# EAGLE board BlackBoard-Artemis (EAGLE 9.3.0), part 1 of 2
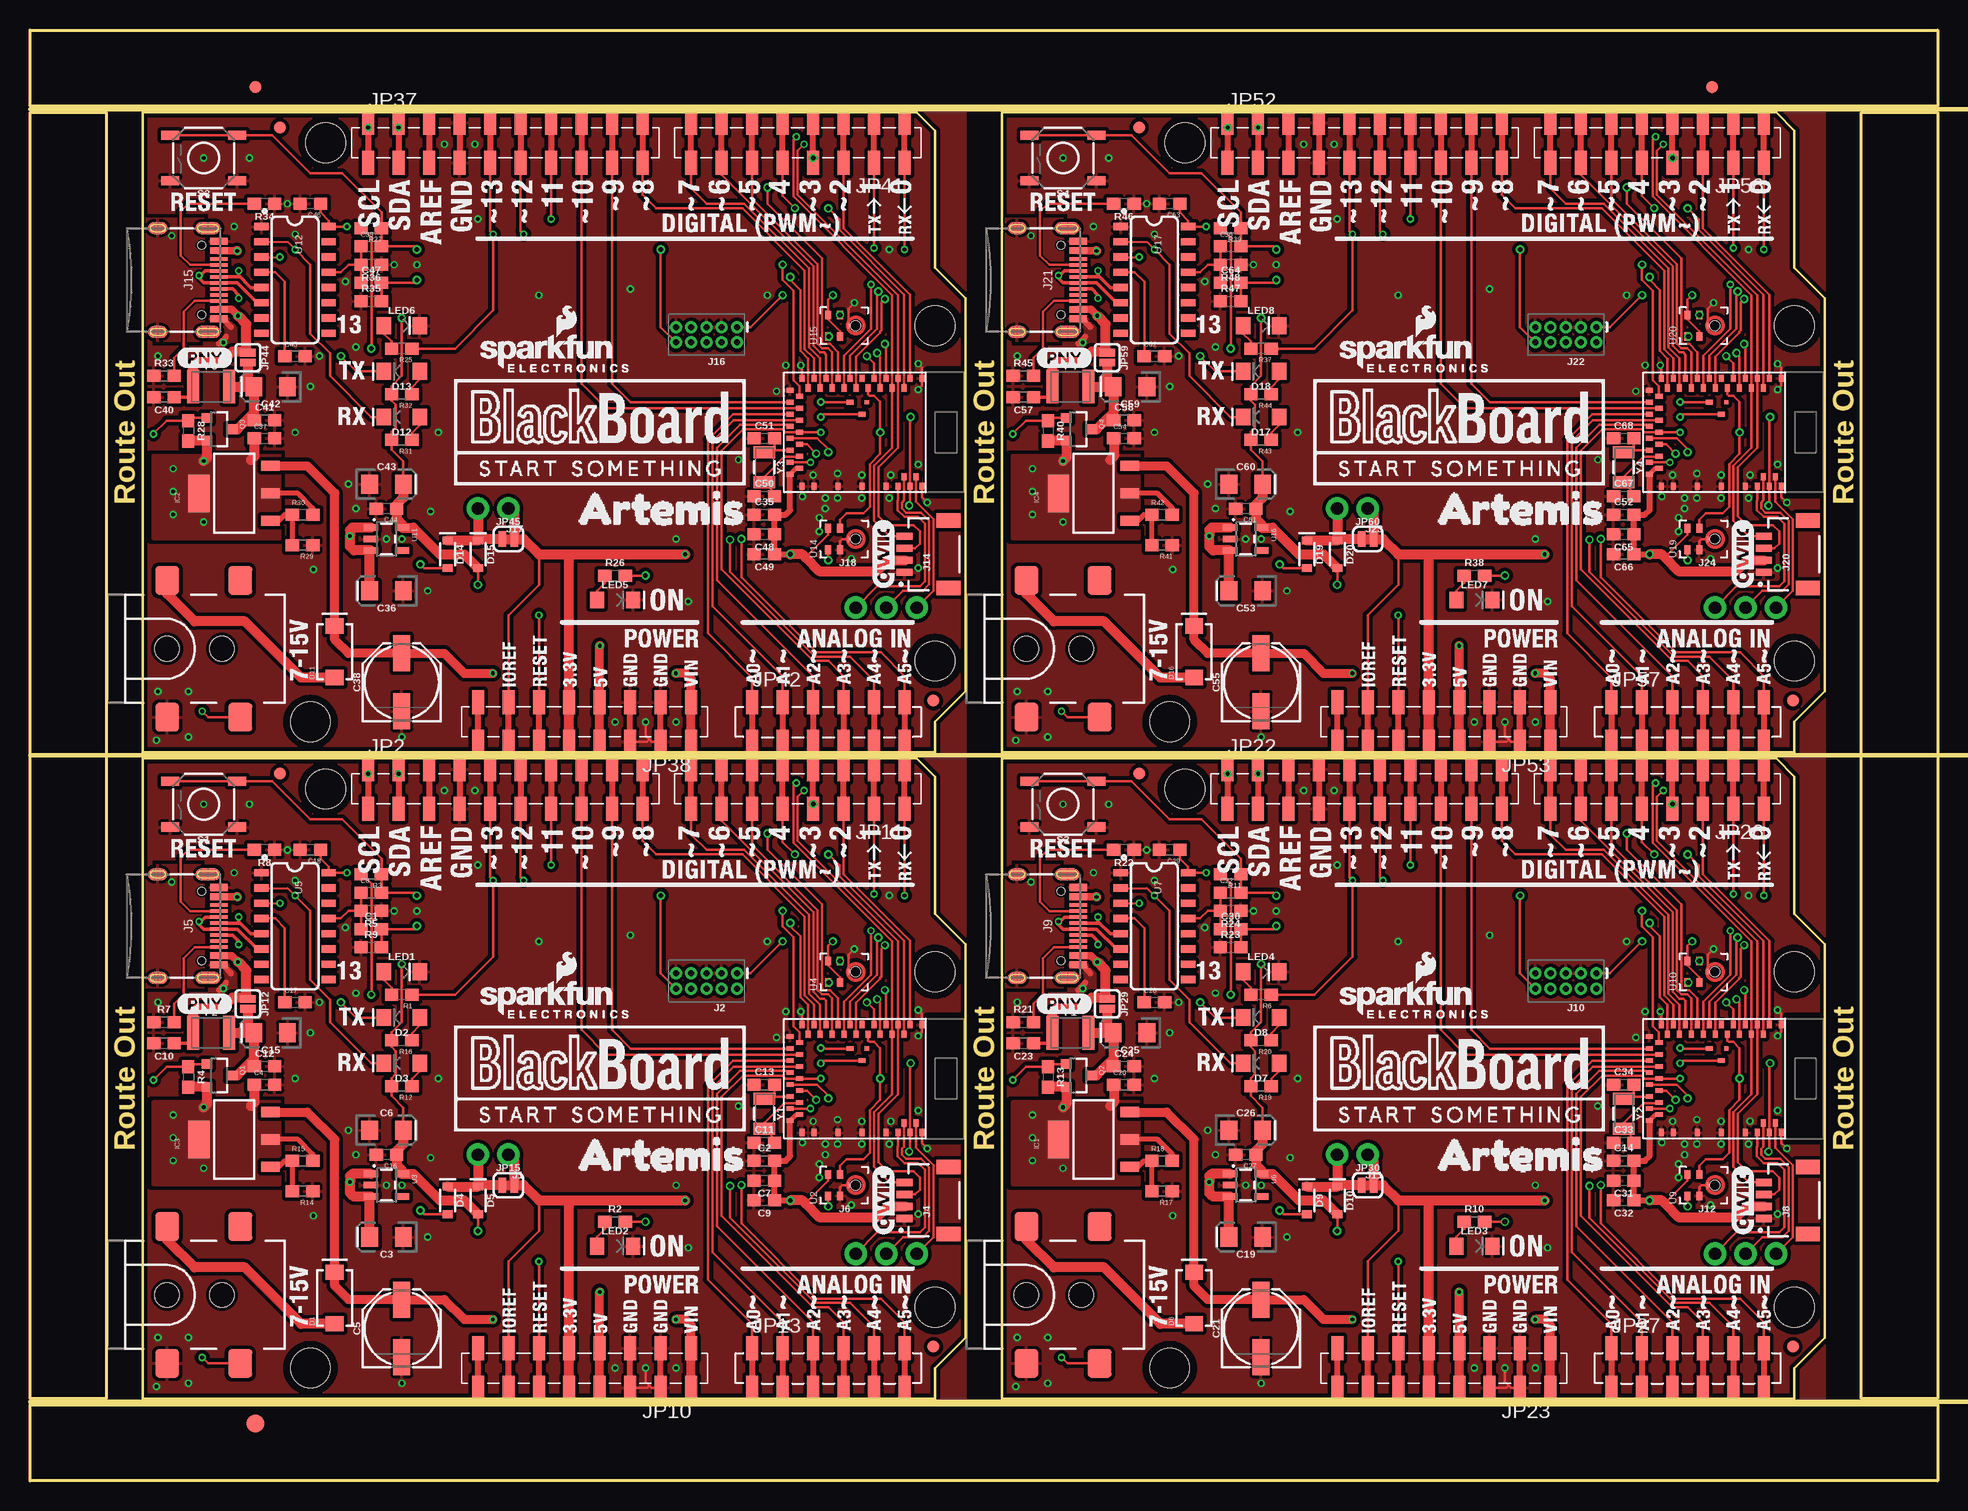
[diagram p0: board, top side]
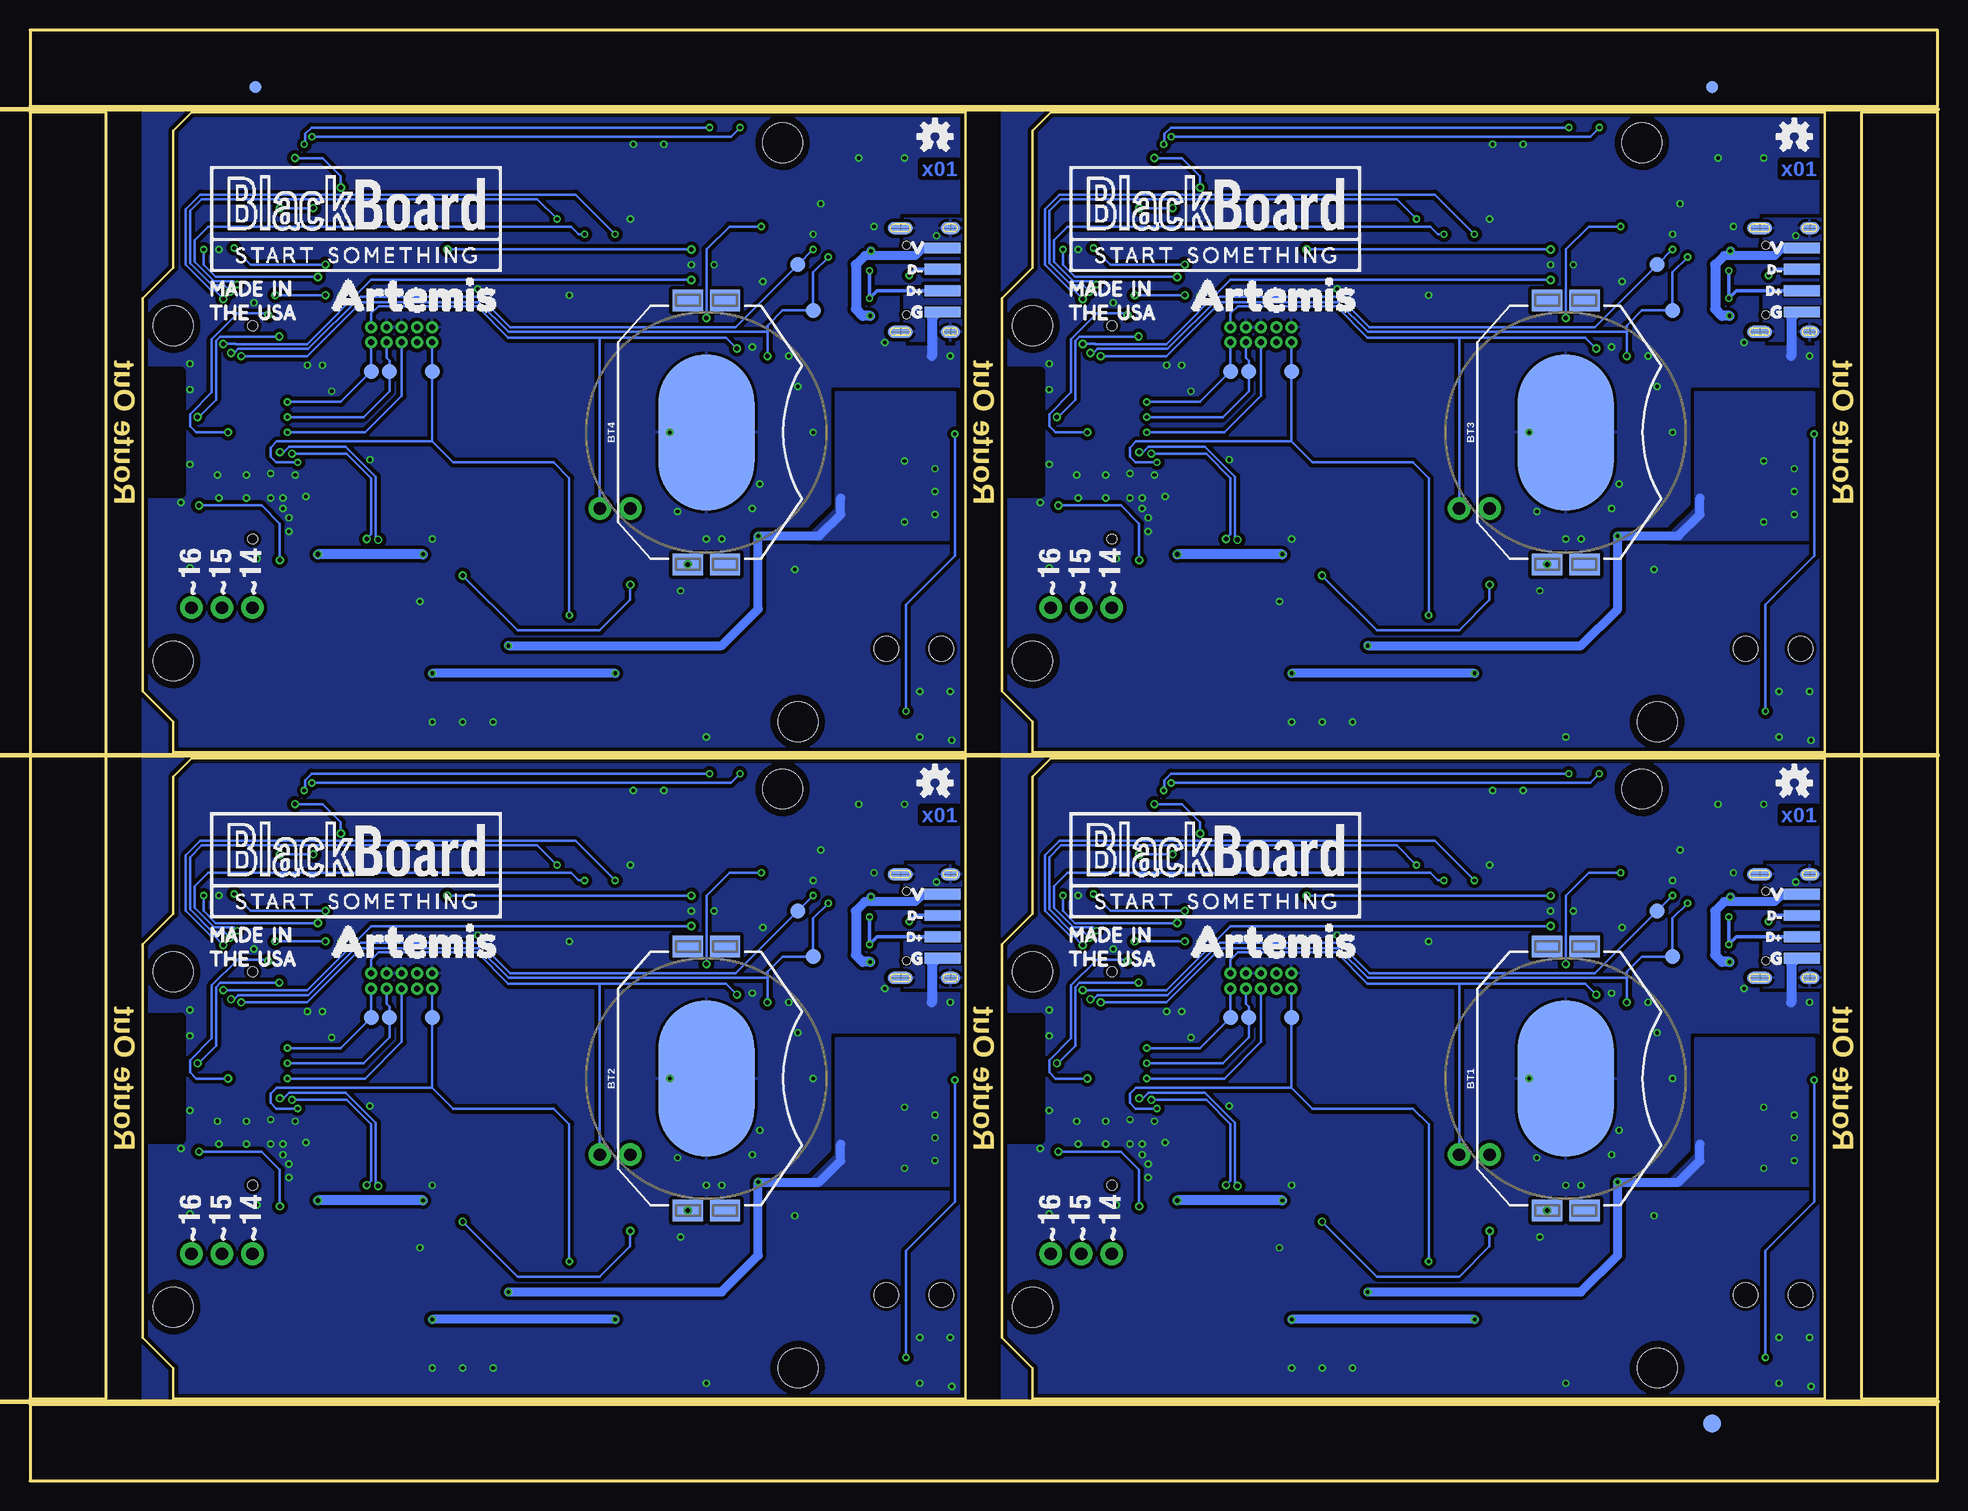
[diagram p1: board, bottom side, seen from below]

Size 159 x 120.9 mm. Coordinates in mm from the lower left corner, seen from the top.
Outline: 9.4,60.2 73.91,60.2 75.44,58.67 75.44,47.24 77.98,44.7 77.98,11.94 75.44,9.4 75.44,6.86 9.4,6.86 9.4,60.2
Outline: 81.03,60.2 145.54,60.2 147.07,58.67 147.07,47.24 149.61,44.7 149.61,11.94 147.07,9.4 147.07,6.86 81.03,6.86 81.03,60.2
Outline: 9.4,114.05 73.91,114.05 75.44,112.52 75.44,101.09 77.98,98.55 77.98,65.79 75.44,63.25 75.44,60.71 9.4,60.71 9.4,114.05
Outline: 81.03,114.05 145.54,114.05 147.07,112.52 147.07,101.09 149.61,98.55 149.61,65.79 147.07,63.25 147.07,60.71 81.03,60.71 81.03,114.05
Outline: 0,6.35 159,6.35 159,0 0,0 0,6.35
Outline: 152.65,114.05 159,114.05 159,6.86 152.65,6.86 152.65,114.05
Outline: 0,120.9 159,120.9 159,114.55 0,114.55 0,120.9
Outline: 0,114.05 6.35,114.05 6.35,6.86 0,6.86 0,114.05
Copper layers (1*16): Top 0.035mm / dielectric 1.5mm / Bottom 0.035mm
Design rules "SparkFun-2-layer-PCBWay-LIMIT": minimum track width 6mil, minimum drill 0.3mm, track to track 6mil, track to pad 6mil, pad to pad 6mil, via to via 6mil, smd to smd 6mil, copper to edge 6mil, drill to drill 6mil, minimum pad ring 6mil, minimum via ring 6mil, stop-mask expansion 4mil, vias tented up to drill 25mil, thermal gap 10mil
Net classes: 0 default: width 0 mm, drill 0 mm; 1 power: width 0.762 mm
tRestrict: area 74.8,28.4 to 78,38.6; area 146.4,28.4 to 149.6,38.6; area 74.8,82.3 to 78,92.5; area 146.4,82.3 to 149.6,92.5
bRestrict: area 74.8,28.4 to 78,38.6; area 146.4,28.4 to 149.6,38.6; area 74.8,82.3 to 78,92.5; area 146.4,82.3 to 149.6,92.5
vRestrict: area 10,29.2 to 11.4,37.5; area 15.1,30 to 16.8,37.5; area 57.3,17.7 to 57.9,18.2; area 59.8,17.5 to 60.3,18.4; area 20.7,36.2 to 22.1,38.5; area 9.7,19.8 to 18.8,31.9; area 81.7,29.2 to 83.1,37.5; area 86.7,30 to 88.4,37.5; area 128.9,17.7 to 129.5,18.2; area 131.4,17.5 to 132,18.4; area 92.3,36.2 to 93.7,38.5; area 81.3,19.8 to 90.4,31.9; area 10,83.1 to 11.4,91.3; area 15.1,83.8 to 16.8,91.3; area 57.3,71.5 to 57.9,72; area 59.8,71.4 to 60.3,72.3; area 20.7,90 to 22.1,92.3; area 9.7,73.7 to 18.8,85.7; area 81.7,83.1 to 83.1,91.3; area 86.7,83.8 to 88.4,91.3; area 128.9,71.5 to 129.5,72; area 131.4,71.4 to 132,72.3; area 92.3,90 to 93.7,92.3; area 81.3,73.7 to 90.4,85.7
Milling: 3 lines

## Footprints (pad centres in the part's own frame; a part is rotated, then mirrored left to right if it is on the bottom)
BATTCON_20MM_4LEGS_OVERPASTE = smd 1.778 x 2.54: 1 -11,1.55; 3 11,1.55; P$1 -11,-1.55; P$2 11,-1.55 | smd 13 x 8: 2 0,0
0603 = smd 1.1 x 1: 1 -0.85,0; 2 0.85,0
EIA3216 = smd 1.4 x 1.6: + 1.4,0; - -1.4,0
PANASONIC_D = smd 3 x 1.4: + 2.4,0; - -2.4,0
SMA-DIODE = smd 1.27 x 1.47: A -2.15,0; C 2.15,0
LED-1206 = smd 1.2 x 1.4: A -1.5,0; C 1.5,0
SOD-323 = smd 0.63 x 0.83: A 1.15,0; C -1.15,0
FIDUCIAL-1X2 = smd 1 x 1: 1 0,0
FIDUCIAL-1.5X3 = smd 1.5 x 1.5: 1 0,0
1210 = smd 1 x 2.8: 1 -1.5,0; 2 1.5,0
SOT223-ALT1 = smd 0.838 x 1.524: 1 -2.271,-3.02; 2 0,-3.02; 3 2.288,-3.02 | smd 3.124 x 1.778: 4 0,2.921
1X02_NO_SILK = drill 1.016 pad 1.88: 1 0,0; 2 2.54,0
2X5-PTH-1.27MM-NO_SILK = drill 0.508 pad 1: 1 -2.54,-0.635; 2 -2.54,0.635; 3 -1.27,-0.635; 4 -1.27,0.635; 5 0,-0.635; 6 0,0.635; 7 1.27,-0.635; 8 1.27,0.635; 9 2.54,-0.635; 10 2.54,0.635
POWER_JACK_SMD_OVERPASTE_SUPER_BOMB_DIGITY = smd 2 x 2.4: GND 0,-5.7; P$4 6.1,-5.7; VIN0 0,5.7; VIN1 6.1,5.7 | hole 2.032: 0,0; 4.572,0
JST04_1MM_RA = smd 0.6 x 1.35: 1 -1.5,0; 2 -0.5,0; 3 0.5,0; 4 1.5,0 | smd 1.2 x 2: NC1 2.8,-3.675; NC2 -2.8,-3.675
USB-C-16P = smd 0.3 x 1.45: A5 -1.25,0; A6 -0.25,0; A7 0.25,0; A8 1.25,0; B5 1.75,0; B6 0.75,0; B7 -0.75,0; B8 -1.75,0 | smd 0.6 x 1.45: GND -3.225,0; GND2 3.225,0 | smd 1 x 2.1: SHLD1 -4.32,-0.915; SHLD2 4.32,-0.915 | smd 1 x 2.1 bottom: SHLD3 -4.32,-0.915; SHLD4 4.32,-0.915 | smd 1 x 1.6: SHLD5 -4.32,-5.095; SHLD8 4.32,-5.095 | smd 1 x 1.6 bottom: SHLD6 -4.32,-5.095; SHLD7 4.32,-5.095 | smd 0.55 x 1.45: VBUS1 -2.45,0; VBUS2 2.45,0 | hole 0.65: -2.89,-1.445; 2.89,-1.445
1X03_NO_SILK = drill 1.016 pad 1.88: 1 0,0; 2 2.54,0; 3 5.08,0
1X10_SMD_COMBINED = smd 1 x 2: 1A 0,1.65; 1B 0,-1.65; 2A 2.54,1.65; 2B 2.54,-1.65; 3A 5.08,1.65; 3B 5.08,-1.65; 4A 7.62,1.65; 4B 7.62,-1.65; 5A 10.16,1.65; 5B 10.16,-1.65; 6A 12.7,1.65; 6B 12.7,-1.65; 7A 15.24,1.65; 7B 15.24,-1.65; 8A 17.78,1.65; 8B 17.78,-1.65; 9A 20.32,1.65; 9B 20.32,-1.65; 10A 22.86,1.65; 10B 22.86,-1.65
STAND-OFF = hole 3.302: 0,0
1X08_SMD_COMBINED = smd 1 x 2: 1A 0,1.65; 1B 0,-1.65; 2A 2.54,-1.65; 2B 2.54,1.65; 3A 5.08,1.65; 3B 5.08,-1.65; 4A 7.62,-1.65; 4B 7.62,1.65; 5A 10.16,1.65; 5B 10.16,-1.65; 6A 12.7,-1.65; 6B 12.7,1.65; 7A 15.24,1.65; 7B 15.24,-1.65; 8A 17.78,-1.65; 8B 17.78,1.65
SMT-JUMPER_2_NO_SILK = smd 0.635 x 1.27: 1 -0.406,0; 2 0.406,0
1X06_SMD_STRAIGHT_COMBO = smd 1 x 2: 1A 0,-1.65; 1B 0,1.65; 2A 2.54,1.65; 2B 2.54,-1.65; 3A 5.08,-1.65; 3B 5.08,1.65; 4A 7.62,1.65; 4B 7.62,-1.65; 5A 10.16,-1.65; 5B 10.16,1.65; 6A 12.7,1.65; 6B 12.7,-1.65
USB-SOLDER-PADS = smd 3 x 0.9: D+ 0,-0.889; D- 0,0.889; GND 0,-2.667; VBUS 0,2.667
SMT-JUMPER_2_NC_TRACE_SILK = smd 0.635 x 1.27: 1 -0.508,0; 2 0.508,0
LED-1206-HIDDENSILK = smd 1.2 x 1.4: A -1.5,0; C 1.5,0
SOT23-3 = smd 0.8 x 0.9: 1 -0.95,-1; 2 0.95,-1; 3 0,1.1
TACTILE_SWITCH_SMD_5.2MM = smd 1.524 x 0.762: 1 -2.794,1.905; 2 2.794,1.905; 3 -2.794,-1.905; 4 2.794,-1.905
PAD.03X.05 = smd 1.27 x 1.27: P$1 0,0
ARTEMIS = smd 0.4 x 0.6: 1 4,4.5; 2 3,4.5; 3 2.5,3.7; 4 2,4.5; 5 1.5,3.7; 6 1,4.5; 7 0.5,3.7; 8 0,4.5; 9 -0.5,3.7; 10 -1,4.5; 11 -1.5,3.7; 12 -2,4.5; 13 -2.5,3.7; 14 -3,4.5; 15 -3.5,3.7; 16 -4,4.5; 17 -4.5,3.7; 18 -5,4.5; 19 -5.5,3.7; 20 -6,4.5; 36 -6,-4.5; 37 -5,-4.5; 38 -3,-4.5; 39 -1,-4.5; 40 1,-4.5; 41 2,-4.5; 42 2.5,-3.7; 43 3,-4.5; 44 3.5,-3.7; 45 4,-4.5 | smd 0.6 x 0.4: 21 -7,3.5; 22 -6.2,3; 23 -7,2.5; 24 -6.2,2; 25 -7,1.5; 26 -6.2,1; 27 -7,0.5; 28 -6.2,0; 29 -7,-0.5; 30 -6.2,-1; 31 -7,-1.5; 32 -6.2,-2; 33 -7,-2.5; 34 -6.2,-3; 35 -7,-3.5; 46 -2,2.5; 47 -1,1.5 | smd 0.35 x 0.35: 48 -0.6,2.5
SPH0641LM4H-1_MICROPHONE = smd 0.725 x 0.522: 1 -0.9,1.3; 2 -0.9,0.3; 4 0.9,0.3; 5 0.9,1.3 | smd 0.5 x 0.17: 3 0,-0.4 | hole 0.8: 0,-1
SOT23-5 = smd 0.55 x 1.2: 1 -0.95,-1.3; 2 0,-1.3; 3 0.95,-1.3; 4 0.95,1.3; 5 -0.95,1.3
SO016 = smd 0.6 x 1.2: 1 -4.445,-2.8; 2 -3.175,-2.8; 3 -1.905,-2.8; 4 -0.635,-2.8; 5 0.635,-2.8; 6 1.905,-2.8; 7 3.175,-2.8; 8 4.445,-2.8; 9 4.445,2.8; 10 3.175,2.8; 11 1.905,2.8; 12 0.635,2.8; 13 -0.635,2.8; 14 -1.905,2.8; 15 -3.175,2.8; 16 -4.445,2.8
CRYSTAL-SMD-3.2X1.5MM = smd 1 x 1.8: P$1 -1.25,0; P$2 1.25,0

## Placement (x,y rotation side)
BT1  CR2032  [BATTCON_20MM_4LEGS_OVERPASTE]  30.99,33.53 90 bottom
BT2  CR2032  [BATTCON_20MM_4LEGS_OVERPASTE]  102.62,33.53 90 bottom
BT3  CR2032  [BATTCON_20MM_4LEGS_OVERPASTE]  30.99,87.38 90 bottom
BT4  CR2032  [BATTCON_20MM_4LEGS_OVERPASTE]  102.62,87.38 90 bottom
C1  2.2uF  [0603]  28.45,45.97 0 top
C2  0.1uF  [0603]  61.21,26.67 0 top
C3  10uF  [EIA3216]  29.72,20.32 180 top
C4  0.1uF  [0603]  19.56,33.02 0 top
C5  47uF  [PANASONIC_D]  30.99,12.7 90 top
C6  10uF  [EIA3216]  29.72,29.21 0 top
C7  10uF  [0603]  61.21,25.02 180 top
C8  10nF  [0603]  28.45,49.02 0 top
C9  1.0uF  [0603]  61.21,23.37 180 top
C10  0.1uF  [0603]  11.18,36.45 180 top
C11  15pF  [0603]  61.21,28.19 0 top
C12  0.1uF  [0603]  19.56,34.54 0 top
C13  15pF  [0603]  61.21,33.02 0 top
C14  0.1uF  [0603]  132.84,26.67 0 top
C15  10uF  [EIA3216]  20.07,37.34 180 top
C16  1.0uF  [0603]  29.72,27.18 180 top
C17  10nF  [0603]  22.1,39.88 0 top
C18  0.1uF  [0603]  23.37,52.58 180 top
C19  10uF  [EIA3216]  101.35,20.32 180 top
C20  0.1uF  [0603]  91.19,33.02 0 top
C21  47uF  [PANASONIC_D]  102.62,12.7 90 top
C22  10nF  [0603]  100.08,49.02 0 top
C23  0.1uF  [0603]  82.8,36.45 180 top
C24  0.1uF  [0603]  91.19,34.54 0 top
C25  10uF  [EIA3216]  91.69,37.34 180 top
C26  10uF  [EIA3216]  101.35,29.21 0 top
C27  1.0uF  [0603]  101.35,27.18 180 top
C28  10nF  [0603]  93.73,39.88 0 top
C29  0.1uF  [0603]  95,52.58 180 top
C30  2.2uF  [0603]  100.08,45.97 0 top
C31  10uF  [0603]  132.84,25.02 180 top
C32  1.0uF  [0603]  132.84,23.37 180 top
C33  15pF  [0603]  132.84,28.19 0 top
C34  15pF  [0603]  132.84,33.02 0 top
C35  0.1uF  [0603]  61.21,80.52 0 top
C36  10uF  [EIA3216]  29.72,74.17 180 top
C37  0.1uF  [0603]  19.56,86.87 0 top
C38  47uF  [PANASONIC_D]  30.99,66.55 90 top
C39  10nF  [0603]  28.45,102.87 0 top
C40  0.1uF  [0603]  11.18,90.3 180 top
C41  0.1uF  [0603]  19.56,88.39 0 top
C42  10uF  [EIA3216]  20.07,91.19 180 top
C43  10uF  [EIA3216]  29.72,83.06 0 top
C44  1.0uF  [0603]  29.72,81.03 180 top
C45  10nF  [0603]  22.1,93.73 0 top
C46  0.1uF  [0603]  23.37,106.43 180 top
C47  2.2uF  [0603]  28.45,99.82 0 top
C48  10uF  [0603]  61.21,78.87 180 top
C49  1.0uF  [0603]  61.21,77.22 180 top
C50  15pF  [0603]  61.21,82.04 0 top
C51  15pF  [0603]  61.21,86.87 0 top
C52  0.1uF  [0603]  132.84,80.52 0 top
C53  10uF  [EIA3216]  101.35,74.17 180 top
C54  0.1uF  [0603]  91.19,86.87 0 top
C55  47uF  [PANASONIC_D]  102.62,66.55 90 top
C56  10nF  [0603]  100.08,102.87 0 top
C57  0.1uF  [0603]  82.8,90.3 180 top
C58  0.1uF  [0603]  91.19,88.39 0 top
C59  10uF  [EIA3216]  91.69,91.19 180 top
C60  10uF  [EIA3216]  101.35,83.06 0 top
C61  1.0uF  [0603]  101.35,81.03 180 top
C62  10nF  [0603]  93.73,93.73 0 top
C63  0.1uF  [0603]  95,106.43 180 top
C64  2.2uF  [0603]  100.08,99.82 0 top
C65  10uF  [0603]  132.84,78.87 180 top
C66  1.0uF  [0603]  132.84,77.22 180 top
C67  15pF  [0603]  132.84,82.04 0 top
C68  15pF  [0603]  132.84,86.87 0 top
D1  1A/40V/500mV  [SMA-DIODE]  25.4,15.24 90 top
D2  GREEN  [LED-1206]  30.99,38.61 180 top
D3  Yellow  [LED-1206]  30.99,34.8 180 top
D4  1A/23V/620mV  [SOD-323]  34.8,23.37 270 top
D5  1A/23V/620mV  [SOD-323]  37.34,23.37 270 top
D6  1A/40V/500mV  [SMA-DIODE]  97.03,15.24 90 top
D7  Yellow  [LED-1206]  102.62,34.8 180 top
D8  GREEN  [LED-1206]  102.62,38.61 180 top
D9  1A/23V/620mV  [SOD-323]  106.43,23.37 270 top
D10  1A/23V/620mV  [SOD-323]  108.97,23.37 270 top
D11  1A/40V/500mV  [SMA-DIODE]  25.4,69.09 90 top
D12  Yellow  [LED-1206]  30.99,88.65 180 top
D13  GREEN  [LED-1206]  30.99,92.46 180 top
D14  1A/23V/620mV  [SOD-323]  34.8,77.22 270 top
D15  1A/23V/620mV  [SOD-323]  37.34,77.22 270 top
D16  1A/40V/500mV  [SMA-DIODE]  97.03,69.09 90 top
D17  Yellow  [LED-1206]  102.62,88.65 180 top
D18  GREEN  [LED-1206]  102.62,92.46 180 top
D19  1A/23V/620mV  [SOD-323]  106.43,77.22 270 top
D20  1A/23V/620mV  [SOD-323]  108.97,77.22 270 top
E$1  [FIDUCIAL-1X2]  18.8,116.14 0 top
E$2  [FIDUCIAL-1X2]  18.8,116.14 0 bottom
E$3  [FIDUCIAL-1X2]  140.21,116.14 0 top
E$4  [FIDUCIAL-1X2]  140.21,116.14 0 bottom
E$5  [FIDUCIAL-1.5X3]  18.8,4.76 0 top
E$6  [FIDUCIAL-1.5X3]  18.8,4.76 0 bottom
F1  6V/2A  [1210]  86.74,37.34 0 top
F2  6V/2A  [1210]  15.11,37.34 0 top
F3  6V/2A  [1210]  15.11,91.19 0 top
F4  6V/2A  [1210]  86.74,91.19 0 top
FRAME1  FRAME-LETTER  [CREATIVE_COMMONS]  4.32,-31.24 0 top  (outside the outline)
FRAME2  FRAME-LETTERNO_PACKAGE  [DUMMY]  -16,-32.51 0 top  (outside the outline)
FRAME3  FRAME-LETTER  [CREATIVE_COMMONS]  75.95,-31.24 0 top  (outside the outline)
FRAME4  FRAME-LETTERNO_PACKAGE  [DUMMY]  55.63,-32.51 0 top  (outside the outline)
FRAME5  FRAME-LETTER  [CREATIVE_COMMONS]  4.32,22.61 0 top
FRAME6  FRAME-LETTERNO_PACKAGE  [DUMMY]  -16,21.34 0 top  (outside the outline)
FRAME7  FRAME-LETTER  [CREATIVE_COMMONS]  75.95,22.61 0 top
FRAME8  FRAME-LETTERNO_PACKAGE  [DUMMY]  55.63,21.34 0 top
IC1  LM1117  [SOT223-ALT1]  88.65,28.45 90 top
IC2  LM1117  [SOT223-ALT1]  17.02,82.3 90 top
IC3  LM1117  [SOT223-ALT1]  17.02,28.45 90 top
IC4  LM1117  [SOT223-ALT1]  88.65,82.3 90 top
J1  [1X02_NO_SILK]  39.88,27.18 180 top
J2  CORTEX_DEBUG  [2X5-PTH-1.27MM-NO_SILK]  56.39,41.66 180 top
J3  POWER_JACKSUPER_BOMB_DIGITY  [POWER_JACK_SMD_OVERPASTE_SUPER_BOMB_DIGITY]  11.43,15.49 0 top
J4  [JST04_1MM_RA]  72.9,23.37 90 top
J5  USB C  [USB-C-16P]  15.75,46.23 270 top
J6  [1X03_NO_SILK]  68.83,18.92 0 top
J7  POWER_JACKSUPER_BOMB_DIGITY  [POWER_JACK_SMD_OVERPASTE_SUPER_BOMB_DIGITY]  83.06,15.49 0 top
J8  [JST04_1MM_RA]  144.53,23.37 90 top
J9  USB C  [USB-C-16P]  87.38,46.23 270 top
J10  CORTEX_DEBUG  [2X5-PTH-1.27MM-NO_SILK]  128.02,41.66 180 top
J11  [1X02_NO_SILK]  111.51,27.18 180 top
J12  [1X03_NO_SILK]  140.46,18.92 0 top
J13  POWER_JACKSUPER_BOMB_DIGITY  [POWER_JACK_SMD_OVERPASTE_SUPER_BOMB_DIGITY]  11.43,69.34 0 top
J14  [JST04_1MM_RA]  72.9,77.22 90 top
J15  USB C  [USB-C-16P]  15.75,100.08 270 top
J16  CORTEX_DEBUG  [2X5-PTH-1.27MM-NO_SILK]  56.39,95.5 180 top
J17  [1X02_NO_SILK]  39.88,81.03 180 top
J18  [1X03_NO_SILK]  68.83,72.77 0 top
J19  POWER_JACKSUPER_BOMB_DIGITY  [POWER_JACK_SMD_OVERPASTE_SUPER_BOMB_DIGITY]  83.06,69.34 0 top
J20  [JST04_1MM_RA]  144.53,77.22 90 top
J21  USB C  [USB-C-16P]  87.38,100.08 270 top
J22  CORTEX_DEBUG  [2X5-PTH-1.27MM-NO_SILK]  128.02,95.5 180 top
J23  [1X02_NO_SILK]  111.51,81.03 180 top
J24  [1X03_NO_SILK]  140.46,72.77 0 top
JP1  SFE_LOGO_NAME.1_INCH  [SFE_LOGO_NAME_.1]  43.05,40.26 0 top
JP2  M10SMD_COMBO  [1X10_SMD_COMBINED]  28.19,57.66 0 top
JP3  STAND-OFF  [STAND-OFF]  23.37,9.4 0 top
JP4  STAND-OFF  [STAND-OFF]  75.44,14.48 0 top
JP5  STAND-OFF  [STAND-OFF]  75.44,42.42 0 top
JP6  STAND-OFF  [STAND-OFF]  24.64,57.66 0 top
JP7  SFE_LOGO_FLAME.1_INCH  [SFE_LOGO_FLAME_.1]  44.7,42.8 0 top
JP8  FIDUCIAL1X2  [FIDUCIAL-1X2]  75.31,11.18 0 top
JP9  FIDUCIAL1X2  [FIDUCIAL-1X2]  20.83,58.93 0 top
JP10  [1X08_SMD_COMBINED]  55.12,9.4 180 top
JP11  JP11  [1X08_SMD_COMBINED]  72.9,57.66 180 top
JP12  JUMPER-SMT_2_NO_SILK  [SMT-JUMPER_2_NO_SILK]  18.16,39.75 270 top
JP13  [1X06_SMD_STRAIGHT_COMBO]  60.2,9.4 0 top
JP14  USB_SOLDER_PADS  [USB-SOLDER-PADS]  11.3,46.23 0 bottom
JP15  [SMT-JUMPER_2_NC_TRACE_SILK]  39.88,24.64 0 top
JP16  STAND-OFF  [STAND-OFF]  95,9.4 0 top
JP17  STAND-OFF  [STAND-OFF]  147.07,14.48 0 top
JP18  STAND-OFF  [STAND-OFF]  147.07,42.42 0 top
JP19  STAND-OFF  [STAND-OFF]  96.27,57.66 0 top
JP20  FIDUCIAL1X2  [FIDUCIAL-1X2]  146.94,11.18 0 top
JP21  FIDUCIAL1X2  [FIDUCIAL-1X2]  92.46,58.93 0 top
JP22  M10SMD_COMBO  [1X10_SMD_COMBINED]  99.82,57.66 0 top
JP23  [1X08_SMD_COMBINED]  126.75,9.4 180 top
JP24  SFE_LOGO_NAME.1_INCH  [SFE_LOGO_NAME_.1]  114.68,40.26 0 top
JP25  SFE_LOGO_FLAME.1_INCH  [SFE_LOGO_FLAME_.1]  116.33,42.8 0 top
JP26  JP11  [1X08_SMD_COMBINED]  144.53,57.66 180 top
JP27  [1X06_SMD_STRAIGHT_COMBO]  131.83,9.4 0 top
JP28  USB_SOLDER_PADS  [USB-SOLDER-PADS]  82.93,46.23 0 bottom
JP29  JUMPER-SMT_2_NO_SILK  [SMT-JUMPER_2_NO_SILK]  89.79,39.75 270 top
JP30  [SMT-JUMPER_2_NC_TRACE_SILK]  111.51,24.64 0 top
JP31  STAND-OFF  [STAND-OFF]  23.37,63.25 0 top
JP32  STAND-OFF  [STAND-OFF]  75.44,68.33 0 top
JP33  STAND-OFF  [STAND-OFF]  75.44,96.27 0 top
JP34  STAND-OFF  [STAND-OFF]  24.64,111.51 0 top
JP35  FIDUCIAL1X2  [FIDUCIAL-1X2]  75.31,65.02 0 top
JP36  FIDUCIAL1X2  [FIDUCIAL-1X2]  20.83,112.78 0 top
JP37  M10SMD_COMBO  [1X10_SMD_COMBINED]  28.19,111.51 0 top
JP38  [1X08_SMD_COMBINED]  55.12,63.25 180 top
JP39  SFE_LOGO_NAME.1_INCH  [SFE_LOGO_NAME_.1]  43.05,94.11 0 top
JP40  SFE_LOGO_FLAME.1_INCH  [SFE_LOGO_FLAME_.1]  44.7,96.65 0 top
JP41  JP11  [1X08_SMD_COMBINED]  72.9,111.51 180 top
JP42  [1X06_SMD_STRAIGHT_COMBO]  60.2,63.25 0 top
JP43  USB_SOLDER_PADS  [USB-SOLDER-PADS]  11.3,100.08 0 bottom
JP44  JUMPER-SMT_2_NO_SILK  [SMT-JUMPER_2_NO_SILK]  18.16,93.6 270 top
JP45  [SMT-JUMPER_2_NC_TRACE_SILK]  39.88,78.49 0 top
JP46  STAND-OFF  [STAND-OFF]  95,63.25 0 top
JP47  STAND-OFF  [STAND-OFF]  147.07,68.33 0 top
JP48  STAND-OFF  [STAND-OFF]  147.07,96.27 0 top
JP49  STAND-OFF  [STAND-OFF]  96.27,111.51 0 top
JP50  FIDUCIAL1X2  [FIDUCIAL-1X2]  146.94,65.02 0 top
JP51  FIDUCIAL1X2  [FIDUCIAL-1X2]  92.46,112.78 0 top
JP52  M10SMD_COMBO  [1X10_SMD_COMBINED]  99.82,111.51 0 top
JP53  [1X08_SMD_COMBINED]  126.75,63.25 180 top
JP54  SFE_LOGO_NAME.1_INCH  [SFE_LOGO_NAME_.1]  114.68,94.11 0 top
JP55  SFE_LOGO_FLAME.1_INCH  [SFE_LOGO_FLAME_.1]  116.33,96.65 0 top
JP56  JP11  [1X08_SMD_COMBINED]  144.53,111.51 180 top
JP57  [1X06_SMD_STRAIGHT_COMBO]  131.83,63.25 0 top
JP58  USB_SOLDER_PADS  [USB-SOLDER-PADS]  82.93,100.08 0 bottom
JP59  JUMPER-SMT_2_NO_SILK  [SMT-JUMPER_2_NO_SILK]  89.79,93.6 270 top
JP60  [SMT-JUMPER_2_NC_TRACE_SILK]  111.51,78.49 0 top
LED1  Blue  [LED-1206-HIDDENSILK]  30.99,42.42 0 top
LED2  GREEN  [LED-1206]  48.77,19.56 0 top
LED3  GREEN  [LED-1206]  120.4,19.56 0 top
LED4  Blue  [LED-1206-HIDDENSILK]  102.62,42.42 0 top
LED5  GREEN  [LED-1206]  48.77,73.41 0 top
LED6  Blue  [LED-1206-HIDDENSILK]  30.99,96.27 0 top
LED7  GREEN  [LED-1206]  120.4,73.41 0 top
LED8  Blue  [LED-1206-HIDDENSILK]  102.62,96.27 0 top
Q1  1.1A/60V/600mΩ  [SOT23-3]  15.75,33.78 270 top
Q2  1.1A/60V/600mΩ  [SOT23-3]  87.38,33.78 270 top
Q3  1.1A/60V/600mΩ  [SOT23-3]  15.75,87.63 270 top
Q4  1.1A/60V/600mΩ  [SOT23-3]  87.38,87.63 270 top
R1  4.7k  [0603]  30.99,40.51 180 top
R2  10k  [0603]  48.77,21.59 0 top
R3  100k  [0603]  28.45,50.55 180 top
R4  10k  [0603]  13.21,33.66 270 top
R5  100k  [0603]  28.45,47.5 180 top
R6  4.7k  [0603]  102.62,40.51 180 top
R7  5.1k  [0603]  11.18,38.23 0 top
R8  5.1k  [0603]  19.56,52.58 180 top
R9  10k  [0603]  28.45,44.45 0 top
R10  10k  [0603]  120.4,21.59 0 top
R11  100k  [0603]  100.08,50.55 180 top
R12  4.7k  [0603]  30.99,32.89 180 top
R13  10k  [0603]  84.84,33.66 270 top
R14  715  [0603]  22.73,24.13 180 top
R15  240  [0603]  22.73,26.67 0 top
R16  4.7k  [0603]  30.99,36.7 180 top
R17  715  [0603]  94.36,24.13 180 top
R18  240  [0603]  94.36,26.67 0 top
R19  4.7k  [0603]  102.62,32.89 180 top
R20  4.7k  [0603]  102.62,36.7 180 top
R21  5.1k  [0603]  82.8,38.23 0 top
R22  5.1k  [0603]  91.19,52.58 180 top
R23  10k  [0603]  100.08,44.45 0 top
R24  100k  [0603]  100.08,47.5 180 top
R25  4.7k  [0603]  30.99,94.36 180 top
R26  10k  [0603]  48.77,75.44 0 top
R27  100k  [0603]  28.45,104.39 180 top
R28  10k  [0603]  13.21,87.5 270 top
R29  715  [0603]  22.73,77.98 180 top
R30  240  [0603]  22.73,80.52 0 top
R31  4.7k  [0603]  30.99,86.74 180 top
R32  4.7k  [0603]  30.99,90.55 180 top
R33  5.1k  [0603]  11.18,92.08 0 top
R34  5.1k  [0603]  19.56,106.43 180 top
R35  10k  [0603]  28.45,98.3 0 top
R36  100k  [0603]  28.45,101.35 180 top
R37  4.7k  [0603]  102.62,94.36 180 top
R38  10k  [0603]  120.4,75.44 0 top
R39  100k  [0603]  100.08,104.39 180 top
R40  10k  [0603]  84.84,87.5 270 top
R41  715  [0603]  94.36,77.98 180 top
R42  240  [0603]  94.36,80.52 0 top
R43  4.7k  [0603]  102.62,86.74 180 top
R44  4.7k  [0603]  102.62,90.55 180 top
R45  5.1k  [0603]  82.8,92.08 0 top
R46  5.1k  [0603]  91.19,106.43 180 top
R47  10k  [0603]  100.08,98.3 0 top
R48  100k  [0603]  100.08,101.35 180 top
S1  [TACTILE_SWITCH_SMD_5.2MM]  14.48,56.39 180 top
S2  [TACTILE_SWITCH_SMD_5.2MM]  86.11,56.39 180 top
S3  [TACTILE_SWITCH_SMD_5.2MM]  14.48,110.24 180 top
S4  [TACTILE_SWITCH_SMD_5.2MM]  86.11,110.24 180 top
TP1  [PAD.03X.05]  57.4,38.61 90 bottom
TP2  [PAD.03X.05]  58.93,38.61 90 bottom
TP3  [PAD.03X.05]  53.85,38.61 0 bottom
TP4  [PAD.03X.05]  129.03,38.61 90 bottom
TP5  TEST-POINT3X5  [PAD.03X.05]  23.37,47.5 90 bottom
TP6  TEST-POINT3X5  [PAD.03X.05]  22.1,43.69 90 bottom
TP7  [PAD.03X.05]  130.56,38.61 90 bottom
TP8  TEST-POINT3X5  [PAD.03X.05]  95,47.5 90 bottom
TP9  TEST-POINT3X5  [PAD.03X.05]  93.73,43.69 90 bottom
TP10  [PAD.03X.05]  125.48,38.61 0 bottom
TP11  [PAD.03X.05]  57.4,92.46 90 bottom
TP12  [PAD.03X.05]  58.93,92.46 90 bottom
TP13  TEST-POINT3X5  [PAD.03X.05]  23.37,101.35 90 bottom
TP14  TEST-POINT3X5  [PAD.03X.05]  22.1,97.54 90 bottom
TP15  [PAD.03X.05]  53.85,92.46 0 bottom
TP16  [PAD.03X.05]  129.03,92.46 90 bottom
TP17  [PAD.03X.05]  130.56,92.46 90 bottom
TP18  TEST-POINT3X5  [PAD.03X.05]  95,101.35 90 bottom
TP19  TEST-POINT3X5  [PAD.03X.05]  93.73,97.54 90 bottom
TP20  [PAD.03X.05]  125.48,92.46 0 bottom
U1  ARTEMIS_FULL  [ARTEMIS]  70.36,33.53 0 top
U2  SPH0641LM4H-1  [SPH0641LM4H-1_MICROPHONE]  67.82,24.64 90 top
U3  AP2112-3.3V  [SOT23-5]  29.72,24.64 270 top
U4  SPH0641LM4H-1  [SPH0641LM4H-1_MICROPHONE]  67.82,42.42 90 top
U5  CH340C  [SO016]  22.1,46.23 270 top
U6  AP2112-3.3V  [SOT23-5]  101.35,24.64 270 top
U7  CH340C  [SO016]  93.73,46.23 270 top
U8  ARTEMIS_FULL  [ARTEMIS]  141.99,33.53 0 top
U9  SPH0641LM4H-1  [SPH0641LM4H-1_MICROPHONE]  139.45,24.64 90 top
U10  SPH0641LM4H-1  [SPH0641LM4H-1_MICROPHONE]  139.45,42.42 90 top
U11  AP2112-3.3V  [SOT23-5]  29.72,78.49 270 top
U12  CH340C  [SO016]  22.1,100.08 270 top
U13  ARTEMIS_FULL  [ARTEMIS]  70.36,87.38 0 top
U14  SPH0641LM4H-1  [SPH0641LM4H-1_MICROPHONE]  67.82,78.49 90 top
U15  SPH0641LM4H-1  [SPH0641LM4H-1_MICROPHONE]  67.82,96.27 90 top
U16  AP2112-3.3V  [SOT23-5]  101.35,78.49 270 top
U17  CH340C  [SO016]  93.73,100.08 270 top
U18  ARTEMIS_FULL  [ARTEMIS]  141.99,87.38 0 top
U19  SPH0641LM4H-1  [SPH0641LM4H-1_MICROPHONE]  139.45,78.49 90 top
U20  SPH0641LM4H-1  [SPH0641LM4H-1_MICROPHONE]  139.45,96.27 90 top
U$1  [BLACKBOARDLOGO#PNG]  47.5,33.53 0 top
U$2  [D#3]  14.99,45.34 0 bottom
U$3  [BLACKBOARDLOGO#PNG]  60.2,51.31 0 bottom
U$4  [MADEINUSA#PNG]  68.83,44.45 0 bottom
U$5  OSHW-LOGOS  [OSHW-LOGO-S]  83.57,58.17 0 bottom
U$6  [BLACKBOARDLOGO#PNG]  119.13,33.53 0 top
U$7  [BLACKBOARDLOGO#PNG]  131.83,51.31 0 bottom
U$8  [MADEINUSA#PNG]  140.46,44.45 0 bottom
U$9  [QWIIC_COPYRIGHT_SMALL]  71.12,23.37 90 top
U$10  [D#4]  14.86,47.12 0 bottom
U$11  [G1]  14.86,43.56 0 bottom
U$12  [V0]  14.86,48.89 0 bottom
U$13  [PNY0]  12.19,39.75 0 top
U$14  [ARTEMIS0]  43.43,27.18 0 top
U$15  [ARTEMIS0]  64.52,44.96 0 bottom
U$16  OSHW-LOGOS  [OSHW-LOGO-S]  11.94,58.17 0 bottom
U$17  [QWIIC_COPYRIGHT_SMALL]  142.75,23.37 90 top
U$18  [G1]  86.49,43.56 0 bottom
U$19  [V0]  86.49,48.89 0 bottom
U$20  [D#3]  86.61,45.34 0 bottom
U$21  [D#4]  86.49,47.12 0 bottom
U$22  [PNY0]  83.82,39.75 0 top
U$23  [ARTEMIS0]  115.06,27.18 0 top
U$24  [ARTEMIS0]  136.14,44.96 0 bottom
U$25  OSHW-LOGOS  [OSHW-LOGO-S]  11.94,112.01 0 bottom
U$26  [BLACKBOARDLOGO#PNG]  47.5,87.38 0 top
U$27  [BLACKBOARDLOGO#PNG]  60.2,105.16 0 bottom
U$28  [MADEINUSA#PNG]  68.83,98.3 0 bottom
U$29  [QWIIC_COPYRIGHT_SMALL]  71.12,77.22 90 top
U$30  [G1]  14.86,97.41 0 bottom
U$31  [V0]  14.86,102.74 0 bottom
U$32  [D#3]  14.99,99.19 0 bottom
U$33  [D#4]  14.86,100.97 0 bottom
U$34  [PNY0]  12.19,93.6 0 top
U$35  [ARTEMIS0]  43.43,81.03 0 top
U$36  [ARTEMIS0]  64.52,98.81 0 bottom
U$37  OSHW-LOGOS  [OSHW-LOGO-S]  83.57,112.01 0 bottom
U$38  [BLACKBOARDLOGO#PNG]  119.13,87.38 0 top
U$39  [BLACKBOARDLOGO#PNG]  131.83,105.16 0 bottom
U$40  [MADEINUSA#PNG]  140.46,98.3 0 bottom
U$41  [QWIIC_COPYRIGHT_SMALL]  142.75,77.22 90 top
U$42  [G1]  86.49,97.41 0 bottom
U$43  [V0]  86.49,102.74 0 bottom
U$44  [D#3]  86.61,99.19 0 bottom
U$45  [D#4]  86.49,100.97 0 bottom
U$46  [PNY0]  83.82,93.6 0 top
U$47  [ARTEMIS0]  115.06,81.03 0 top
U$48  [ARTEMIS0]  136.14,98.81 0 bottom
Y1  32.768kHz  [CRYSTAL-SMD-3.2X1.5MM]  61.21,30.61 270 top
Y2  32.768kHz  [CRYSTAL-SMD-3.2X1.5MM]  132.84,30.61 270 top
Y3  32.768kHz  [CRYSTAL-SMD-3.2X1.5MM]  61.21,84.45 270 top
Y4  32.768kHz  [CRYSTAL-SMD-3.2X1.5MM]  132.84,84.45 270 top

## Library data of the parts
BT1-BT4 = SparkFun-Batteries; PROD_ID: PRT-11892; SF_SKU: BATT-10373
C1 C30 C47 C64 = SparkFun-Capacitors; PROD_ID: CAP-07888
C2 C4 C10 C12 C14 C18 C20 C23 C24 C29 C35 C37 C40 C41 C46 C52 C54 C57 C58 C63 = SparkFun-Capacitors; PROD_ID: CAP-00810
C3 C6 C15 C19 C25 C26 C36 C42 C43 C53 C59 C60 = SparkFun-Capacitors; PROD_ID: CAP-00811
C5 C21 C38 C55 = SparkFun-Capacitors; PROD_ID: CAP-08478
C7 C31 C48 C65 = SparkFun-Capacitors; PROD_ID: CAP-11015
C8 C17 C22 C28 C39 C45 C56 C62 = SparkFun-Capacitors; PROD_ID: CAP-00867
C9 C16 C27 C32 C44 C49 C61 C66 = SparkFun-Capacitors; PROD_ID: CAP-00868
C11 C13 C33 C34 C50 C51 C67 C68 = SparkFun-Capacitors; PROD_ID: CAP-07881
D1 D6 D11 D16 = SparkFun-DiscreteSemi; PROD_ID: DIO-08053
D2 D8 D13 D18 LED2 LED3 LED5 LED7 = SparkFun-LED; PROD_ID: DIO-09910
D3 D7 D12 D17 = SparkFun-LED; PROD_ID: DIO-09909
D4 D5 D9 D10 D14 D15 D19 D20 = SparkFun-DiscreteSemi; PROD_ID: DIO-11623
E$1-E$4 FRAME1 FRAME3 FRAME5 FRAME7 JP1 JP7 JP24 JP25 JP39 JP40 JP54 JP55 U$5 U$16 U$25 U$37 = SparkFun-Aesthetics
E$5 E$6 = SparkFun-Retired
F1-F4 = SparkFun-Fuses; PROD_ID: RES-14313
FRAME2 FRAME4 FRAME6 FRAME8 = SparkFun-Aesthetics; DESIGNER: Nobody; VERSION: v01
IC1-IC4 = Testing; PROD_ID: VREG-08170
J1 J2 J6 J10-J12 J16-J18 J22-J24 JP14 JP28 JP43 JP58 TP1-TP20 = SparkFun-Connectors
J3 J7 J13 J19 = Testing; PROD_ID: CONN-08106
J4 J8 J14 J20 = SparkFun-Connectors; PROD_ID: CONN-13694
J5 J9 J15 J21 = SparkFun-Connectors; PROD_ID: CONN-14122
JP2 JP22 JP37 JP52 = SparkFun-Connectors; PROD_ID: CONN-11219
JP3-JP6 JP8 JP9 JP16-JP21 JP31-JP36 JP46-JP51 = SparkFun
JP10 JP11 JP23 JP26 JP38 JP41 JP53 JP56 = SparkFun-Connectors; PROD_ID: CONN-10204
JP12 JP15 JP29 JP30 JP44 JP45 JP59 JP60 = SparkFun-Jumpers
JP13 JP27 JP42 JP57 = SparkFun-Connectors; PROD_ID: CONN-10203
LED1 LED4 LED6 LED8 = SparkFun-LED; PROD_ID: DIO-09911
Q1-Q4 = SparkFun-DiscreteSemi; PROD_ID: TRANS-08285
R1 R6 R12 R16 R19 R20 R25 R31 R32 R37 R43 R44 = SparkFun-Resistors; PROD_ID: RES-07857
R2 R4 R9 R10 R13 R23 R26 R28 R35 R38 R40 R47 = SparkFun-Resistors; PROD_ID: RES-00824
R3 R5 R11 R24 R27 R36 R39 R48 = SparkFun-Resistors; PROD_ID: RES-07828
R7 R8 R21 R22 R33 R34 R45 R46 = SparkFun-Resistors; PROD_ID: RES-12083
R14 R17 R29 R41 = SparkFun-Resistors; PROD_ID: RES-07850
R15 R18 R30 R42 = SparkFun-Resistors; PROD_ID: RES-07849
S1-S4 = SparkFun-Switches; PROD_ID: SWCH-14139
U1 U8 U13 U18 = Module-Pads; PROD_ID: SUB-14359
U2 U4 U9 U10 U14 U15 U19 U20 = SparkFun-Sensors; PROD_ID: IC-14361
U3 U6 U11 U16 = SparkFun-PowerIC; PROD_ID: VREG-12457
U5 U7 U12 U17 = SparkFun-IC-Comms; PROD_ID: IC-14038
U$1 U$3 U$6 U$7 U$26 U$27 U$38 U$39 = blackboardlogo
U$2 U$10 U$20 U$21 U$32 U$33 U$44 U$45 = buzzard_labels (14)
U$4 U$8 U$28 U$40 = madeinusa
U$9 U$17 U$29 U$41 = Labels
U$11 U$12 U$18 U$19 U$30 U$31 U$42 U$43 = buzzard_labels (13)
U$13 U$22 U$34 U$46 = buzzard_labels
U$14 U$15 U$23 U$24 U$35 U$36 U$47 U$48 = buzzard_labels (3)
Y1-Y4 = SparkFun-Clocks; PROD_ID: XTAL-13062

## Nets
3.3V: C6.+ C16.1 C18.1 D5.A R2.2 R12.2 R16.2 U3.5 U5.16
3.3V1: C26.+ C27.1 C29.1 D10.A R10.2 R19.2 R20.2 U6.5 U7.16
3.3V2: C43.+ C44.1 C46.1 D15.A R26.2 R31.2 R32.2 U11.5 U12.16
3.3V3: C60.+ C61.1 C63.1 D20.A R38.2 R43.2 R44.2 U16.5 U17.16
5V [power]: C3.+ C4.1 IC3.2 IC3.4 JP10.4A JP10.4B Q1.2 R4.2 R15.2 U3.1 U3.3
5V1 [power]: C19.+ C20.1 IC1.2 IC1.4 JP23.4A JP23.4B Q2.2 R13.2 R18.2 U6.1 U6.3
5V2 [power]: C36.+ C37.1 IC2.2 IC2.4 JP38.4A JP38.4B Q3.2 R28.2 R30.2 U11.1 U11.3
5V3 [power]: C53.+ C54.1 IC4.2 IC4.4 JP53.4A JP53.4B Q4.2 R40.2 R42.2 U16.1 U16.3
!DTR: C1.1 C8.1 R5.2 U5.13
!DTR1: C22.1 C30.1 R24.2 U7.13
!DTR2: C39.1 C47.1 R36.2 U12.13
!DTR3: C56.1 C64.1 R48.2 U17.13
!RESET: C8.2 J2.10 JP10.6A JP10.6B R3.1 S1.3 S1.4 TP3.P$1 U1.33
!RESET1: C22.2 J10.10 JP23.6A JP23.6B R11.1 S2.3 S2.4 TP10.P$1 U8.33
!RESET2: C39.2 J16.10 JP38.6A JP38.6B R27.1 S3.3 S3.4 TP15.P$1 U13.33
!RESET3: C56.2 J22.10 JP53.6A JP53.6B R39.1 S4.3 S4.4 TP20.P$1 U18.33
BOOT: C1.2 R9.2 U1.6
BOOT1: C30.2 R23.2 U8.6
BOOT2: C47.2 R35.2 U13.6
BOOT3: C64.2 R47.2 U18.6
CC1: J5.A5 R8.2
CC2: J5.B5 R7.2
CC3: J9.B5 R21.2
CC4: J9.A5 R22.2
CC5: J15.B5 R33.2
CC6: J15.A5 R34.2
CC7: J21.B5 R45.2
CC8: J21.A5 R46.2
D1: JP26.5A JP26.5B U8.3
D2: JP41.5A JP41.5B U13.3
D3: JP56.5A JP56.5B U18.3
D4: JP11.5A JP11.5B U1.3
D11/MOSI: JP2.7A JP2.7B U1.12
D11/MOSI1: JP22.7A JP22.7B U8.12
D11/MOSI2: JP37.7A JP37.7B U13.12
D11/MOSI3: JP52.7A JP52.7B U18.12
D+: J5.A6 J5.B6 JP14.D+ U5.5
D+1: J9.A6 J9.B6 JP28.D+ U7.5
D+2: J15.A6 J15.B6 JP43.D+ U12.5
D+3: J21.A6 J21.B6 JP58.D+ U17.5
D-: J5.A7 J5.B7 JP14.D- U5.6
D-1: J9.A7 J9.B7 JP28.D- U7.6
D-2: J15.A7 J15.B7 JP43.D- U12.6
D-3: J21.A7 J21.B7 JP58.D- U17.6
GND: BT1.2 C2.1 C3.- C4.2 C5.- C6.- C7.2 C9.2 C10.2 C11.1 C12.2 C13.1 C15.- C16.2 C17.2 C18.2 J2.3 J2.5 J2.9 J3.GND J4.1 J5.GND J5.GND2 JP2.4A JP2.4B JP10.2A JP10.2B JP10.3A JP10.3B JP14.GND LED1.C LED2.C R5.1 R7.1 R8.1 R9.1 R14.1 S1.1 S1.2 U1.1 U1.20 U1.21 U1.36 U1.37 U1.38 U1.39 U1.40 U1.45 U2.2 U2.3 U3.2 U4.3 U5.1
GND1: BT2.2 C14.1 C19.- C20.2 C21.- C23.2 C24.2 C25.- C26.- C27.2 C28.2 C29.2 C31.2 C32.2 C33.1 C34.1 J7.GND J8.1 J9.GND J9.GND2 J10.3 J10.5 J10.9 JP22.4A JP22.4B JP23.2A JP23.2B JP23.3A JP23.3B JP28.GND LED3.C LED4.C R17.1 R21.1 R22.1 R23.1 R24.1 S2.1 S2.2 U6.2 U7.1 U8.1 U8.20 U8.21 U8.36 U8.37 U8.38 U8.39 U8.40 U8.45 U9.2 U9.3 U10.3
GND2: BT3.2 C35.1 C36.- C37.2 C38.- C40.2 C41.2 C42.- C43.- C44.2 C45.2 C46.2 C48.2 C49.2 C50.1 C51.1 J13.GND J14.1 J15.GND J15.GND2 J16.3 J16.5 J16.9 JP37.4A JP37.4B JP38.2A JP38.2B JP38.3A JP38.3B JP43.GND LED5.C LED6.C R29.1 R33.1 R34.1 R35.1 R36.1 S3.1 S3.2 U11.2 U12.1 U13.1 U13.20 U13.21 U13.36 U13.37 U13.38 U13.39 U13.40 U13.45 U14.2 U14.3 U15.3
GND3: BT4.2 C52.1 C53.- C54.2 C55.- C57.2 C58.2 C59.- C60.- C61.2 C62.2 C63.2 C65.2 C66.2 C67.1 C68.1 J19.GND J20.1 J21.GND J21.GND2 J22.3 J22.5 J22.9 JP52.4A JP52.4B JP53.2A JP53.2B JP53.3A JP53.3B JP58.GND LED7.C LED8.C R41.1 R45.1 R46.1 R47.1 R48.1 S4.1 S4.2 U16.2 U17.1 U18.1 U18.20 U18.21 U18.36 U18.37 U18.38 U18.39 U18.40 U18.45 U19.2 U19.3 U20.3
INSERT: J3.P$4 Q1.1 R4.1
INSERT1: J7.P$4 Q2.1 R13.1
INSERT2: J13.P$4 Q3.1 R28.1
INSERT3: J19.P$4 Q4.1 R40.1
N$1: LED1.A R1.2
N$2: LED2.A R2.1
N$3: D4.C D5.C J1.2 JP15.1
N$5: D2.A R16.1
N$6: C17.1 U5.4
N$7: C11.2 U1.32 Y1.P$2
N$8: C13.2 U1.31 Y1.P$1
N$9: D3.A R12.1
N$10: LED3.A R10.1
N$11: LED4.A R6.2
N$12: IC1.1 R17.2 R18.1
N$13: D8.A R20.1
N$14: D7.A R19.1
N$15: IC3.1 R14.2 R15.1
N$16: C28.1 U7.4
N$17: D9.C D10.C J11.2 JP30.1
N$19: C33.2 U8.32 Y2.P$2
N$20: C34.2 U8.31 Y2.P$1
N$21: LED5.A R26.1
N$22: LED6.A R25.2
N$23: IC2.1 R29.2 R30.1
N$24: D13.A R32.1
N$25: D12.A R31.1
N$26: C45.1 U12.4
N$27: D14.C D15.C J17.2 JP45.1
N$29: C50.2 U13.32 Y3.P$2
N$30: C51.2 U13.31 Y3.P$1
N$31: LED7.A R38.1
N$32: LED8.A R37.2
N$33: IC4.1 R41.2 R42.1
N$34: D18.A R44.1
N$35: D17.A R43.1
N$36: C62.1 U17.4
N$37: D19.C D20.C J23.2 JP60.1
N$39: C67.2 U18.32 Y4.P$2
N$40: C68.2 U18.31 Y4.P$1
PDMCLK: U1.9 U2.4 U4.4
PDMCLK1: U8.9 U9.4 U10.4
PDMCLK2: U13.9 U14.4 U15.4
PDMCLK3: U18.9 U19.4 U20.4
PDMDATA: U1.43 U2.1 U4.1
PDMDATA1: U8.43 U9.1 U10.1
PDMDATA2: U13.43 U14.1 U15.1
PDMDATA3: U18.43 U19.1 U20.1
PWRIN [power]: D1.A J3.VIN0
PWRIN1 [power]: D6.A J7.VIN0
PWRIN2 [power]: D11.A J13.VIN0
PWRIN3 [power]: D16.A J19.VIN0
RXI-0: D3.C TP5.P$1 U1.7 U5.2
RXI-1: D7.C TP8.P$1 U7.2 U8.7
RXI-2: D12.C TP13.P$1 U12.2 U13.7
RXI-3: D17.C TP18.P$1 U17.2 U18.7
SDA: J4.3 JP2.2A JP2.2B U1.4
SDA1: J8.3 JP22.2A JP22.2B U8.4
SDA2: J14.3 JP37.2A JP37.2B U13.4
SDA3: J20.3 JP52.2A JP52.2B U18.4
SHLD: J5.SHLD1 J5.SHLD2 J5.SHLD3 J5.SHLD4 J5.SHLD5 J5.SHLD6 J5.SHLD7 J5.SHLD8
SHLD1: J9.SHLD1 J9.SHLD2 J9.SHLD3 J9.SHLD4 J9.SHLD5 J9.SHLD6 J9.SHLD7 J9.SHLD8
SHLD2: J15.SHLD1 J15.SHLD2 J15.SHLD3 J15.SHLD4 J15.SHLD5 J15.SHLD6 J15.SHLD7 J15.SHLD8
SHLD3: J21.SHLD1 J21.SHLD2 J21.SHLD3 J21.SHLD4 J21.SHLD5 J21.SHLD6 J21.SHLD7 J21.SHLD8
SWDCK: J2.4 TP1.P$1 U1.47
SWDCK1: J10.4 TP4.P$1 U8.47
SWDCK2: J16.4 TP11.P$1 U13.47
SWDCK3: J22.4 TP16.P$1 U18.47
SWDIO: J2.2 TP2.P$1 U1.46
SWDIO1: J10.2 TP7.P$1 U8.46
SWDIO2: J16.2 TP12.P$1 U13.46
SWDIO3: J22.2 TP17.P$1 U18.46
TXO-0: D2.C TP6.P$1 U1.8 U5.3
TXO-1: D8.C TP9.P$1 U7.3 U8.8
TXO-2: D13.C TP14.P$1 U12.3 U13.8
TXO-3: D18.C TP19.P$1 U17.3 U18.8
USBVCC [power]: C12.1 C15.+ F2.2 JP12.2 Q1.3
USBVCC1 [power]: C24.1 C25.+ F1.2 JP29.2 Q2.3
USBVCC2 [power]: C41.1 C42.+ F3.2 JP44.2 Q3.3
USBVCC3 [power]: C58.1 C59.+ F4.2 JP59.2 Q4.3
V_BATT: BT1.1 D4.A
V_BATT1: BT2.1 D9.A
V_BATT2: BT3.1 D14.A
V_BATT3: BT4.1 D19.A
VDD: C2.2 C7.1 C9.1 J1.1 J2.1 J4.2 JP10.5A JP10.5B JP10.7A JP10.7B JP15.2 R3.2 U1.34 U1.35 U2.5 U4.2 U4.5
VDD1: C14.2 C31.1 C32.1 J8.2 J10.1 J11.1 JP23.5A JP23.5B JP23.7A JP23.7B JP30.2 R11.2 U8.34 U8.35 U9.5 U10.2 U10.5
VDD2: C35.2 C48.1 C49.1 J14.2 J16.1 J17.1 JP38.5A JP38.5B JP38.7A JP38.7B JP45.2 R27.2 U13.34 U13.35 U14.5 U15.2 U15.5
VDD3: C52.2 C65.1 C66.1 J20.2 J22.1 J23.1 JP53.5A JP53.5B JP53.7A JP53.7B JP60.2 R39.2 U18.34 U18.35 U19.5 U20.2 U20.5
VIN [power]: C5.+ D1.C IC3.3 JP10.1A JP10.1B
VIN1 [power]: C21.+ D6.C IC1.3 JP23.1A JP23.1B
VIN2 [power]: C38.+ D11.C IC2.3 JP38.1A JP38.1B
VIN3 [power]: C55.+ D16.C IC4.3 JP53.1A JP53.1B
VUSB [power]: C10.1 F2.1 J5.VBUS1 J5.VBUS2 JP12.1 JP14.VBUS
VUSB1 [power]: C23.1 F1.1 J9.VBUS1 J9.VBUS2 JP28.VBUS JP29.1
VUSB2 [power]: C40.1 F3.1 J15.VBUS1 J15.VBUS2 JP43.VBUS JP44.1
VUSB3 [power]: C57.1 F4.1 J21.VBUS1 J21.VBUS2 JP58.VBUS JP59.1
~AD0: JP13.1A JP13.1B U1.25
~AD1: JP13.2A JP13.2B U1.26
~AD2: JP13.3A JP13.3B U1.27
~AD3: JP27.1A JP27.1B U8.25
~AD3/SWO: J2.6 JP13.4A JP13.4B U1.28
~AD3/SWO1: J10.6 JP27.4A JP27.4B U8.28
~AD3/SWO2: J16.6 JP42.4A JP42.4B U13.28
~AD3/SWO3: J22.6 JP57.4A JP57.4B U18.28
~AD4: JP13.5A JP13.5B U1.29
~AD5: JP13.6A JP13.6B U1.30
~AD6: JP27.2A JP27.2B U8.26
~AD7: JP27.3A JP27.3B U8.27
~AD8: JP27.5A JP27.5B U8.29
~AD9: JP27.6A JP27.6B U8.30
~AD10: JP42.1A JP42.1B U13.25
~AD11: JP42.2A JP42.2B U13.26
~AD12: JP42.3A JP42.3B U13.27
~AD13: JP42.5A JP42.5B U13.29
~AD14: JP42.6A JP42.6B U13.30
~AD15: JP57.1A JP57.1B U18.25
~AD16: JP57.2A JP57.2B U18.26
~AD17: JP57.3A JP57.3B U18.27
~AD18: JP57.5A JP57.5B U18.29
~AD19: JP57.6A JP57.6B U18.30
~D1: JP26.3A JP26.3B U8.2
~D2: JP11.3A JP11.3B U1.2
~D3: JP11.4A JP11.4B U1.14
~D4: JP26.6A JP26.6B U8.15
~D5: JP11.6A JP11.6B U1.15
~D6: JP11.7A JP11.7B U1.16
~D7: JP11.8A JP11.8B U1.17
~D8: JP2.10A JP2.10B U1.18
~D9: JP2.9A JP2.9B U1.23
~D10: JP2.8A JP2.8B U1.24
~D11: JP26.7A JP26.7B U8.16
~D12: JP26.8A JP26.8B U8.17
~D12/MISO: JP2.6A JP2.6B U1.13
~D12/MISO1: JP22.6A JP22.6B U8.13
~D12/MISO2: JP37.6A JP37.6B U13.13
~D12/MISO3: JP52.6A JP52.6B U18.13
~D13: JP22.10A JP22.10B U8.18
~D13/SCK: JP2.5A JP2.5B R1.1 U1.11
~D13/SCK1: JP22.5A JP22.5B R6.1 U8.11
~D13/SCK2: JP37.5A JP37.5B R25.1 U13.11
~D13/SCK3: JP52.5A JP52.5B R37.1 U18.11
~D14: J6.1 U1.41
~D15: J6.2 U1.42
~D16: J6.3 U1.44
~D17: JP22.9A JP22.9B U8.23
~D18: JP22.8A JP22.8B U8.24
~D19: J12.1 U8.41
~D20: J12.2 U8.42
~D21: J12.3 U8.44
~D22: JP26.4A JP26.4B U8.14
~D23: JP41.3A JP41.3B U13.2
~D24: JP41.6A JP41.6B U13.15
~D25: JP41.7A JP41.7B U13.16
~D26: JP41.8A JP41.8B U13.17
~D27: JP37.10A JP37.10B U13.18
~D28: JP37.9A JP37.9B U13.23
~D29: JP37.8A JP37.8B U13.24
~D30: J18.1 U13.41
~D31: J18.2 U13.42
~D32: J18.3 U13.44
~D33: JP41.4A JP41.4B U13.14
~D34: JP56.3A JP56.3B U18.2
~D35: JP56.6A JP56.6B U18.15
~D36: JP56.7A JP56.7B U18.16
~D37: JP56.8A JP56.8B U18.17
~D38: JP52.10A JP52.10B U18.18
~D39: JP52.9A JP52.9B U18.23
~D40: JP52.8A JP52.8B U18.24
~D41: J24.1 U18.41
~D42: J24.2 U18.42
~D43: J24.3 U18.44
~D44: JP56.4A JP56.4B U18.14
~RXI-1: JP11.1A JP11.1B U1.19
~RXI-2: JP26.1A JP26.1B U8.19
~RXI-3: JP41.1A JP41.1B U13.19
~RXI-4: JP56.1A JP56.1B U18.19
~SCL: J4.4 JP2.1A JP2.1B U1.5
~SCL1: J8.4 JP22.1A JP22.1B U8.5
~SCL2: J14.4 JP37.1A JP37.1B U13.5
~SCL3: J20.4 JP52.1A JP52.1B U18.5
~TXO-1: JP11.2A JP11.2B U1.22
~TXO-2: JP26.2A JP26.2B U8.22
~TXO-3: JP41.2A JP41.2B U13.22
~TXO-4: JP56.2A JP56.2B U18.22

## Tracks (layer width: path | path; a pad name or v marks a point on that pad's centre or on a via)
3.3V  (via drill 0.3, 0.38)
  Top 0.203: C18.1 24.22,51.85 24.9,51.17 U5.16 v26.42,50.67 | C6.+ 31.12,31.11 30.14,32.09 R12.2 30.14,33.57 30.48,33.91 30.48,35.81 30.14,36.16 R16.2 30.14,37.38 30.99,38.23 v30.99,43.05 | R2.2 v51.31,21.59 | v37.34,20.83 D5.A
  Top 0.508: 30.99,25.62 U3.5
  Top 0.813: C6.+ 31.12,28.07 30.57,27.52 C16.1 30.57,26.33 30.99,25.91 30.99,25.62 | U3.5 31.94,25.59 34.16,23.37 36.19,23.37 D5.A
  Bottom 0.203: v26.42,50.67 29.08,50.67 30.99,48.77 v30.99,43.05 | v51.31,21.59 46.74,17.02 39.88,17.02 37.34,19.56 v37.34,20.83
3.3V1  (via drill 0.3, 0.38)
  Top 0.203: C29.1 95.85,51.85 96.53,51.17 U7.16 v98.04,50.67 | C26.+ 102.75,31.11 101.77,32.09 R19.2 101.77,33.57 102.11,33.91 102.11,35.81 101.77,36.16 R20.2 101.77,37.38 102.62,38.23 v102.62,43.05 | R10.2 v122.94,21.59 | v108.97,20.83 D10.A
  Top 0.508: 102.62,25.62 U6.5
  Top 0.813: C26.+ 102.75,28.07 102.2,27.52 C27.1 102.2,26.33 102.62,25.91 102.62,25.62 | U6.5 103.57,25.59 105.79,23.37 107.82,23.37 D10.A
  Bottom 0.203: v98.04,50.67 100.71,50.67 102.62,48.77 v102.62,43.05 | v122.94,21.59 118.36,17.02 111.51,17.02 108.97,19.56 v108.97,20.83
3.3V2  (via drill 0.3, 0.38)
  Top 0.203: C46.1 24.22,105.7 24.9,105.02 U12.16 v26.42,104.52 | C43.+ 31.12,84.96 30.14,85.94 R31.2 30.14,87.42 30.48,87.76 30.48,89.66 30.14,90 R32.2 30.14,91.23 30.99,92.08 v30.99,96.9 | R26.2 v51.31,75.44 | v37.34,74.68 D15.A
  Top 0.508: 30.99,79.47 U11.5
  Top 0.813: C43.+ 31.12,81.92 30.57,81.37 C44.1 30.57,80.18 30.99,79.76 30.99,79.47 | U11.5 31.94,79.44 34.16,77.22 36.19,77.22 D15.A
  Bottom 0.203: v26.42,104.52 29.08,104.52 30.99,102.62 v30.99,96.9 | v51.31,75.44 46.74,70.87 39.88,70.87 37.34,73.41 v37.34,74.68
3.3V3  (via drill 0.3, 0.38)
  Top 0.203: C63.1 95.85,105.7 96.53,105.02 U17.16 v98.04,104.52 | C60.+ 102.75,84.96 101.77,85.94 R43.2 101.77,87.42 102.11,87.76 102.11,89.66 101.77,90 R44.2 101.77,91.23 102.62,92.08 v102.62,96.9 | R38.2 v122.94,75.44 | v108.97,74.68 D20.A
  Top 0.508: 102.62,79.47 U16.5
  Top 0.813: C60.+ 102.75,81.92 102.2,81.37 C61.1 102.2,80.18 102.62,79.76 102.62,79.47 | U16.5 103.57,79.44 105.79,77.22 107.82,77.22 D20.A
  Bottom 0.203: v98.04,104.52 100.71,104.52 102.62,102.62 v102.62,96.9 | v122.94,75.44 118.36,70.87 111.51,70.87 108.97,73.41 v108.97,74.68
5V  (via drill 0.3)
  Top 0.406: IC3.2 22.35,28.45 23.58,27.22 R15.2
  Top 0.508: 28.32,23.59 U3.3
  Top 0.762: JP10.4B JP10.4A v47.5,15.75
  Top 0.813: C3.+ 28.32,23.59 | v14.48,31.13 14.75,31.4 Q1.2 13.23,32.83 R4.2 | U3.3 26.98,23.69 26.67,24 v26.67,24.89 26.67,25.4 26.86,25.59 U3.1 | C4.1 18.71,31.54 18.41,31.24
  Bottom 0.762: v47.5,15.75 29.72,15.75 26.67,18.8 v26.67,24.89 21.59,24.89 19.81,26.67 19.81,28.07
  other vias: 11.94,28.59 14.48,26.05 11.94,26.68 11.94,30.49
  pour Bottom (isolate 0.305, no thermals): 10.29,36.83 20.19,36.83 20.19,27.18 22.1,25.27 22.1,24.64 10.29,24.64
  pour Top (isolate 0.305, no thermals): 10.29,24.64 10.29,31.62 20.83,31.62 20.83,24.64
5V1  (via drill 0.3)
  Top 0.406: IC1.2 93.98,28.45 95.21,27.22 R18.2
  Top 0.508: 99.95,23.59 U6.3
  Top 0.762: JP23.4B JP23.4A v119.13,15.75
  Top 0.813: C19.+ 99.95,23.59 | v86.11,31.13 86.38,31.4 Q2.2 84.86,32.83 R13.2 | U6.3 98.61,23.69 98.3,24 v98.3,24.89 98.3,25.4 98.49,25.59 U6.1 | C20.1 90.34,31.54 90.04,31.24
  Bottom 0.762: v119.13,15.75 101.35,15.75 98.3,18.8 v98.3,24.89 93.22,24.89 91.44,26.67 91.44,28.07
  other vias: 83.57,28.59 86.11,26.05 83.57,26.68 83.57,30.49
  pour Bottom (isolate 0.305, no thermals): 81.91,36.83 91.82,36.83 91.82,27.18 93.73,25.27 93.73,24.64 81.91,24.64
  pour Top (isolate 0.305, no thermals): 81.91,24.64 81.91,31.62 92.46,31.62 92.46,24.64
5V2  (via drill 0.3)
  Top 0.406: IC2.2 22.35,82.3 23.58,81.06 R30.2
  Top 0.508: 28.32,77.44 U11.3
  Top 0.762: JP38.4B JP38.4A v47.5,69.6
  Top 0.813: C36.+ 28.32,77.44 | v14.48,84.98 14.75,85.25 Q3.2 13.23,86.68 R28.2 | U11.3 26.98,77.54 26.67,77.85 v26.67,78.74 26.67,79.25 26.86,79.44 U11.1 | C37.1 18.71,85.38 18.41,85.09
  Bottom 0.762: v47.5,69.6 29.72,69.6 26.67,72.64 v26.67,78.74 21.59,78.74 19.81,80.52 19.81,81.92
  other vias: 11.94,82.44 14.48,79.9 11.94,80.53 11.94,84.34
  pour Bottom (isolate 0.305, no thermals): 10.29,90.68 20.19,90.68 20.19,81.03 22.1,79.12 22.1,78.49 10.29,78.49
  pour Top (isolate 0.305, no thermals): 10.29,78.49 10.29,85.47 20.83,85.47 20.83,78.49
5V3  (via drill 0.3)
  Top 0.406: IC4.2 93.98,82.3 95.21,81.06 R42.2
  Top 0.508: 99.95,77.44 U16.3
  Top 0.762: JP53.4B JP53.4A v119.13,69.6
  Top 0.813: C53.+ 99.95,77.44 | v86.11,84.98 86.38,85.25 Q4.2 84.86,86.68 R40.2 | U16.3 98.61,77.54 98.3,77.85 v98.3,78.74 98.3,79.25 98.49,79.44 U16.1 | C54.1 90.34,85.38 90.04,85.09
  Bottom 0.762: v119.13,69.6 101.35,69.6 98.3,72.64 v98.3,78.74 93.22,78.74 91.44,80.52 91.44,81.92
  other vias: 83.57,82.44 86.11,79.9 83.57,80.53 83.57,84.34
  pour Bottom (isolate 0.305, no thermals): 81.91,90.68 91.82,90.68 91.82,81.03 93.73,79.12 93.73,78.49 81.91,78.49
  pour Top (isolate 0.305, no thermals): 81.91,78.49 81.91,85.47 92.46,85.47 92.46,78.49
!DTR
  Top 0.203: R5.2 C1.1 | U5.13 25.91,46.86 26.54,47.5 R5.2 | C8.1 R5.2
!DTR1
  Top 0.203: R24.2 C30.1 | U7.13 97.54,46.86 98.17,47.5 R24.2 | C22.1 R24.2
!DTR2
  Top 0.203: R36.2 C47.1 | U12.13 25.91,100.71 26.54,101.35 R36.2 | C39.1 R36.2
!DTR3
  Top 0.203: R48.2 C64.1 | U17.13 97.54,100.71 98.17,101.35 R48.2 | C56.1 R48.2
!RESET  (via drill 0.3, 0.38)
  Top 0.203: JP10.6B JP10.6A v42.42,18.29 | S1.4 S1.3 20.19,58.29 23.37,55.12 26.04,55.12 29.3,51.85 R3.1 C8.2 32,49.02 v32.26,48.77 | U1.33 v65.06,31.03 | v52.58,48.77 52.58,42.29 J2.10
  Bottom 0.203: v32.26,48.77 v52.58,48.77 | v42.42,18.29 42.42,29.72 43.73,31.03 52.11,31.03 53.85,32.77 | 53.85,32.77 J2.10 TP3.P$1 | v65.06,31.03 66.84,31.03 67.31,31.5 67.31,32.26 66.8,32.77 53.85,32.77
!RESET1  (via drill 0.3, 0.38)
  Top 0.203: JP23.6B JP23.6A v114.05,18.29 | S2.4 S2.3 91.82,58.29 95,55.12 97.66,55.12 100.93,51.85 R11.1 C22.2 103.63,49.02 v103.89,48.77 | U8.33 v136.69,31.03 | v124.21,48.77 124.21,42.29 J10.10
  Bottom 0.203: v103.89,48.77 v124.21,48.77 | v114.05,18.29 114.05,29.72 115.36,31.03 123.74,31.03 125.48,32.77 | 125.48,32.77 J10.10 TP10.P$1 | v136.69,31.03 138.47,31.03 138.94,31.5 138.94,32.26 138.43,32.77 125.48,32.77
!RESET2  (via drill 0.3, 0.38)
  Top 0.203: JP38.6B JP38.6A v42.42,72.14 | S3.4 S3.3 20.19,112.14 23.37,108.97 26.04,108.97 29.3,105.7 R27.1 C39.2 32,102.87 v32.26,102.62 | U13.33 v65.06,84.88 | v52.58,102.62 52.58,96.14 J16.10
  Bottom 0.203: v32.26,102.62 v52.58,102.62 | v42.42,72.14 42.42,83.57 43.73,84.88 52.11,84.88 53.85,86.61 | 53.85,86.61 J16.10 TP15.P$1 | v65.06,84.88 66.84,84.88 67.31,85.34 67.31,86.11 66.8,86.61 53.85,86.61
!RESET3  (via drill 0.3, 0.38)
  Top 0.203: JP53.6B JP53.6A v114.05,72.14 | S4.4 S4.3 91.82,112.14 95,108.97 97.66,108.97 100.93,105.7 R39.1 C56.2 103.63,102.87 v103.89,102.62 | U18.33 v136.69,84.88 | v124.21,102.62 124.21,96.14 J22.10
  Bottom 0.203: v103.89,102.62 v124.21,102.62 | v114.05,72.14 114.05,83.57 115.36,84.88 123.74,84.88 125.48,86.61 | 125.48,86.61 J22.10 TP20.P$1 | v136.69,84.88 138.47,84.88 138.94,85.34 138.94,86.11 138.43,86.61 125.48,86.61
BOOT  (via drill 0.38)
  Top 0.203: R9.2 C1.2 32,45.97 v32.26,46.23 | U1.6 71.36,40.8 v71.26,40.89
  Bottom 0.203: v71.26,40.89 70.25,40.89 70.22,40.87 64.29,40.87 58.93,46.23 v32.26,46.23
BOOT1  (via drill 0.38)
  Top 0.203: R23.2 C30.2 103.63,45.97 v103.89,46.23 | U8.6 142.99,40.8 v142.89,40.89
  Bottom 0.203: v142.89,40.89 141.88,40.89 141.85,40.87 135.91,40.87 130.56,46.23 v103.89,46.23
BOOT2  (via drill 0.38)
  Top 0.203: R35.2 C47.2 32,99.82 v32.26,100.08 | U13.6 71.36,94.65 v71.26,94.74
  Bottom 0.203: v71.26,94.74 70.25,94.74 70.22,94.72 64.29,94.72 58.93,100.08 v32.26,100.08
BOOT3  (via drill 0.38)
  Top 0.203: R47.2 C64.2 103.63,99.82 v103.89,100.08 | U18.6 142.99,94.65 v142.89,94.74
  Bottom 0.203: v142.89,94.74 141.88,94.74 141.85,94.72 135.91,94.72 130.56,100.08 v103.89,100.08
CC1
  Top 0.203: J5.A5 13.36,47.48 12.57,48.26 12.57,51.94 13.21,52.58 R8.2
CC2
  Top 0.203: J5.B5 13.74,44.48 12.83,43.56 12.83,40.55 12.03,39.75 R7.2
CC3
  Top 0.203: J9.B5 85.37,44.48 84.45,43.56 84.45,40.55 83.65,39.75 R21.2
CC4
  Top 0.203: J9.A5 84.98,47.48 84.2,48.26 84.2,51.94 84.84,52.58 R22.2
CC5
  Top 0.203: J15.B5 13.74,98.33 12.83,97.41 12.83,94.4 12.03,93.6 R33.2
CC6
  Top 0.203: J15.A5 13.36,101.33 12.57,102.11 12.57,105.79 13.21,106.43 R34.2
CC7
  Top 0.203: J21.B5 85.37,98.33 84.45,97.41 84.45,94.4 83.65,93.6 R45.2
CC8
  Top 0.203: J21.A5 84.98,101.33 84.2,102.11 84.2,105.79 84.84,106.43 R46.2
D1  (via drill 0.38)
  Top 0.203: JP26.5B JP26.5A 134.37,53.23 v135.39,52.21 | U8.3 144.49,45 139.09,50.4 139.09,51.28 v138.18,52.2
  Bottom 0.203: v138.18,52.2 135.38,52.2 v135.39,52.21
D2  (via drill 0.38)
  Top 0.203: JP41.5B JP41.5A 62.74,107.08 v63.76,106.06 | U13.3 72.86,98.85 67.46,104.25 67.46,105.13 v66.55,106.05
  Bottom 0.203: v66.55,106.05 63.75,106.05 v63.76,106.06
D3  (via drill 0.38)
  Top 0.203: JP56.5B JP56.5A 134.37,107.08 v135.39,106.06 | U18.3 144.49,98.85 139.09,104.25 139.09,105.13 v138.18,106.05
  Bottom 0.203: v138.18,106.05 135.38,106.05 v135.39,106.06
D4  (via drill 0.38)
  Top 0.203: JP11.5B JP11.5A 62.74,53.23 v63.76,52.21 | U1.3 72.86,45 67.46,50.4 67.46,51.28 v66.55,52.2
  Bottom 0.203: v66.55,52.2 63.75,52.2 v63.76,52.21
D11/MOSI  (via drill 0.3, 0.38)
  Top 0.203: JP2.7A JP2.7B v43.43,51.31 | U1.12 68.36,39.91 70.61,42.16 70.61,45.18 v70.7,45.27
  Bottom 0.203: v43.43,51.31 45.08,52.96 73.06,52.96 74.04,51.97 74.04,47.63 72.18,45.77 71.2,45.77 v70.7,45.27
D11/MOSI1  (via drill 0.3, 0.38)
  Top 0.203: JP22.7A JP22.7B v115.06,51.31 | U8.12 139.99,39.91 142.24,42.16 142.24,45.18 v142.33,45.27
  Bottom 0.203: v115.06,51.31 116.71,52.96 144.68,52.96 145.67,51.97 145.67,47.63 143.81,45.77 142.83,45.77 v142.33,45.27
D11/MOSI2  (via drill 0.3, 0.38)
  Top 0.203: JP37.7A JP37.7B v43.43,105.16 | U13.12 68.36,93.76 70.61,96.01 70.61,99.03 v70.7,99.12
  Bottom 0.203: v43.43,105.16 45.08,106.81 73.06,106.81 74.04,105.82 74.04,101.48 72.18,99.62 71.2,99.62 v70.7,99.12
D11/MOSI3  (via drill 0.3, 0.38)
  Top 0.203: JP52.7A JP52.7B v115.06,105.16 | U18.12 139.99,93.76 142.24,96.01 142.24,99.03 v142.33,99.12
  Bottom 0.203: v115.06,105.16 116.71,106.81 144.68,106.81 145.67,105.82 145.67,101.48 143.81,99.62 142.83,99.62 v142.33,99.12
D+  (via drill 0.3)
  Top 0.305: J5.A6 17.4,46.48 17.4,46.6 | 17.4,46.6 18.41,45.59 U5.5 | J5.B6 16.88,45.48 17.4,44.96 v17.4,44.7 | v17.4,46.99 17.4,46.6
  Bottom 0.305: v17.4,46.99 v17.4,44.7 16.76,45.34 JP14.D+
D+1  (via drill 0.3)
  Top 0.305: J9.A6 89.03,46.48 89.03,46.6 | 89.03,46.6 90.04,45.59 U7.5 | J9.B6 88.51,45.48 89.03,44.96 v89.03,44.7 | v89.03,46.99 89.03,46.6
  Bottom 0.305: v89.03,46.99 v89.03,44.7 88.39,45.34 JP28.D+
D+2  (via drill 0.3)
  Top 0.305: J15.A6 17.4,100.33 17.4,100.45 | 17.4,100.45 18.41,99.44 U12.5 | J15.B6 16.88,99.33 17.4,98.81 v17.4,98.55 | v17.4,100.84 v17.4,100.83 17.4,100.45
  Bottom 0.305: v17.4,100.84 v17.4,98.55 16.76,99.19 JP43.D+
D+3  (via drill 0.3)
  Top 0.305: J21.A6 89.03,100.33 89.03,100.45 | 89.03,100.45 90.04,99.44 U17.5 | J21.B6 88.51,99.33 89.03,98.81 v89.03,98.55 | v89.03,100.84 v89.03,100.83 89.03,100.45
  Bottom 0.305: v89.03,100.84 v89.03,98.55 88.39,99.19 JP58.D+
D-  (via drill 0.3)
  Top 0.305: J5.B7 14.59,46.98 14.22,46.61 v14.1,46.61 14.1,46.35 14.48,45.97 J5.A7 17.27,45.98 18.92,44.32 U5.6
  Bottom 0.305: JP14.D- 13.59,47.12 v14.1,46.61
D-1  (via drill 0.3)
  Top 0.305: J9.B7 86.22,46.98 85.85,46.61 v85.72,46.61 85.72,46.35 86.11,45.97 J9.A7 88.9,45.98 90.55,44.32 U7.6
  Bottom 0.305: JP28.D- 85.22,47.12 v85.72,46.61
D-2  (via drill 0.3)
  Top 0.305: J15.B7 14.59,100.83 14.22,100.46 v14.1,100.46 14.1,100.2 14.48,99.82 J15.A7 17.27,99.83 18.92,98.17 U12.6
  Bottom 0.305: JP43.D- 13.59,100.97 v14.1,100.46
D-3  (via drill 0.3)
  Top 0.305: J21.B7 86.22,100.83 85.85,100.46 v85.72,100.46 85.72,100.2 86.11,99.82 J21.A7 88.9,99.83 90.55,98.17 U17.6
  Bottom 0.305: JP58.D- 85.22,100.97 v85.72,100.46
GND  (via drill 0.3)
  Top 0.203: JP10.2B 51.81,7.75 51.62,7.94 | 51.62,7.94 51.31,8.25 v51.31,9.4 | JP10.3A 51.44,7.75 51.62,7.94 | v74.04,39.24 74.36,38.93 U1.1 74.36,37.4 v74.04,37.08 | U1.45 74.36,28.13 v74.8,27.69 | U1.20 64.36,39.02 v64.26,39.12 | 67.56,24.51 67.56,24.38 | U2.2 67.52,24.46 67.56,24.51 | U4.3 68.22,43.83 v68.71,44.32 | U2.3 67.69,24.64 67.56,24.51
  Top 0.508: 16.34,41.51 15.75,40.92 | 16.05,43 16.76,42.29
  Bottom 0.813: JP14.GND 11.68,43.56 12.19,43.05 12.19,39.88
  other vias: 14.48,56.39 37.08,57.53 10.67,11.94 37.34,51.31 27.18,27.18 23.62,22.1 16.13,41.02 23.37,37.34 24.13,39.88 22.1,33.53 22.1,50.04 18.29,56.39 33.15,20.32 17.02,50.67 10.67,39.88 29.72,24.64 30.99,24.64 33.4,26.92 26.54,29.21 21.46,52.58 13.21,8.13 13.21,11.94 10.54,7.87 30.99,8.13 53.85,9.4 48.77,9.4 27.18,40.64 26.29,46.1 32.26,47.5 30.35,47.5 62.23,36.96 62.99,39.12 69.34,28.07 67.31,28.07 66.29,28.07 64.39,28.19 66.29,27.18 65.79,26.42 65.79,25.27 74.04,22.23 54.86,19.43 34.54,57.53 71.63,28.07 67.31,30.1 65.28,29.97 69.34,29.97 71.75,29.97 74.04,30.86 34.04,33.53 42.42,44.96 50.04,45.47 61.47,44.96 71.63,48.77 53.85,24.64 68.45,22.99 59.05,31.24
  pour Top (isolate 0.305, rank 2): 9.4,60.2 77.98,60.2 77.98,6.86 9.4,6.86
  pour Bottom (isolate 0.305, rank 2): 9.4,60.2 77.98,60.2 77.98,6.86 9.4,6.86
GND1  (via drill 0.3)
  Top 0.203: JP23.2B 123.44,7.75 123.25,7.94 | 123.25,7.94 122.94,8.25 v122.94,9.4 | JP23.3A 123.06,7.75 123.25,7.94 | v145.67,39.24 145.99,38.93 U8.1 145.99,37.4 v145.67,37.08 | U8.45 145.99,28.13 v146.43,27.69 | U8.20 135.99,39.02 v135.89,39.12 | 139.19,24.51 139.19,24.38 | U9.2 139.15,24.46 139.19,24.51 | U10.3 139.85,43.83 v140.34,44.32 | U9.3 139.32,24.64 139.19,24.51
  Top 0.508: 87.97,41.51 87.38,40.92 | 87.68,43 88.39,42.29
  Bottom 0.813: JP28.GND 83.31,43.56 83.82,43.05 83.82,39.88
  other vias: 86.11,56.39 108.71,57.53 82.3,11.94 108.97,51.31 98.81,27.18 95.25,22.1 87.76,41.02 95,37.34 95.76,39.88 93.73,33.53 93.73,50.04 89.92,56.39 104.77,20.32 88.65,50.67 82.3,39.88 101.35,24.64 102.62,24.64 105.03,26.92 98.17,29.21 93.09,52.58 84.84,8.13 84.84,11.94 82.17,7.87 102.62,8.13 125.48,9.4 120.4,9.4 98.81,40.64 97.92,46.1 103.89,47.5 101.98,47.5 133.86,36.96 134.62,39.12 140.97,28.07 138.94,28.07 137.92,28.07 136.02,28.19 137.92,27.18 137.41,26.42 137.41,25.27 145.67,22.23 126.49,19.43 106.17,57.53 143.26,28.07 138.94,30.1 136.91,29.97 140.97,29.97 143.38,29.97 145.67,30.86 105.66,33.53 114.05,44.96 121.67,45.47 133.1,44.96 143.26,48.77 125.48,24.64 140.08,22.99 130.68,31.24
  pour Top (isolate 0.305, rank 2): 81.03,60.2 149.61,60.2 149.61,6.86 81.03,6.86
  pour Bottom (isolate 0.305, rank 2): 81.03,60.2 149.61,60.2 149.61,6.86 81.03,6.86
GND2  (via drill 0.3)